# Altium PCB HornetPCB.PcbDoc (part 1 of 2)
Units mil, origin at the board's own origin, x right, y up, seen from the top; angles counter-clockwise.
Board outline 2280 x 3500 mil, 4 copper layers (Top Layer, Ground, Power, Bottom Layer), stack 23.756 mil thick; 76 components, 42 nets, 264 pads, 76 vias.
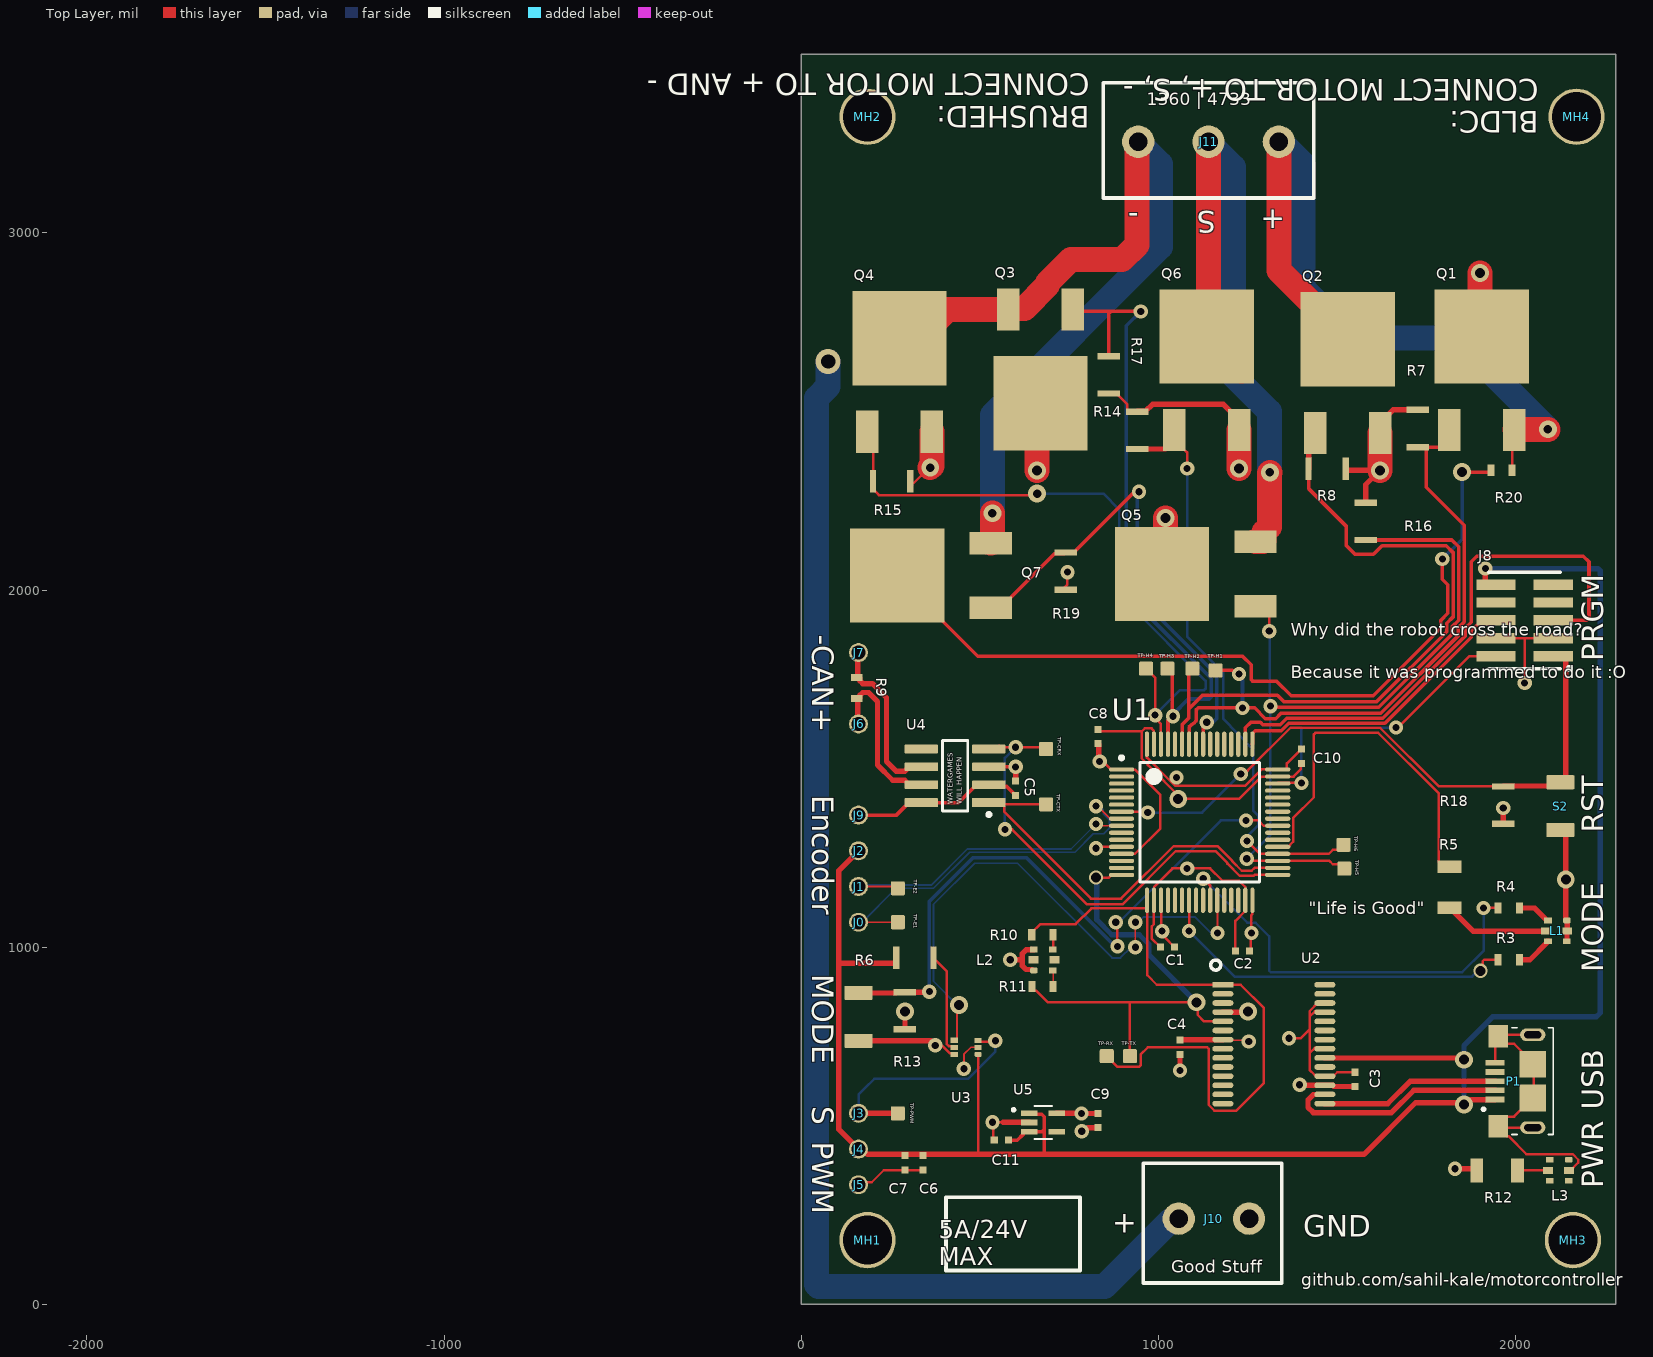
[diagram p0: Top Layer view]
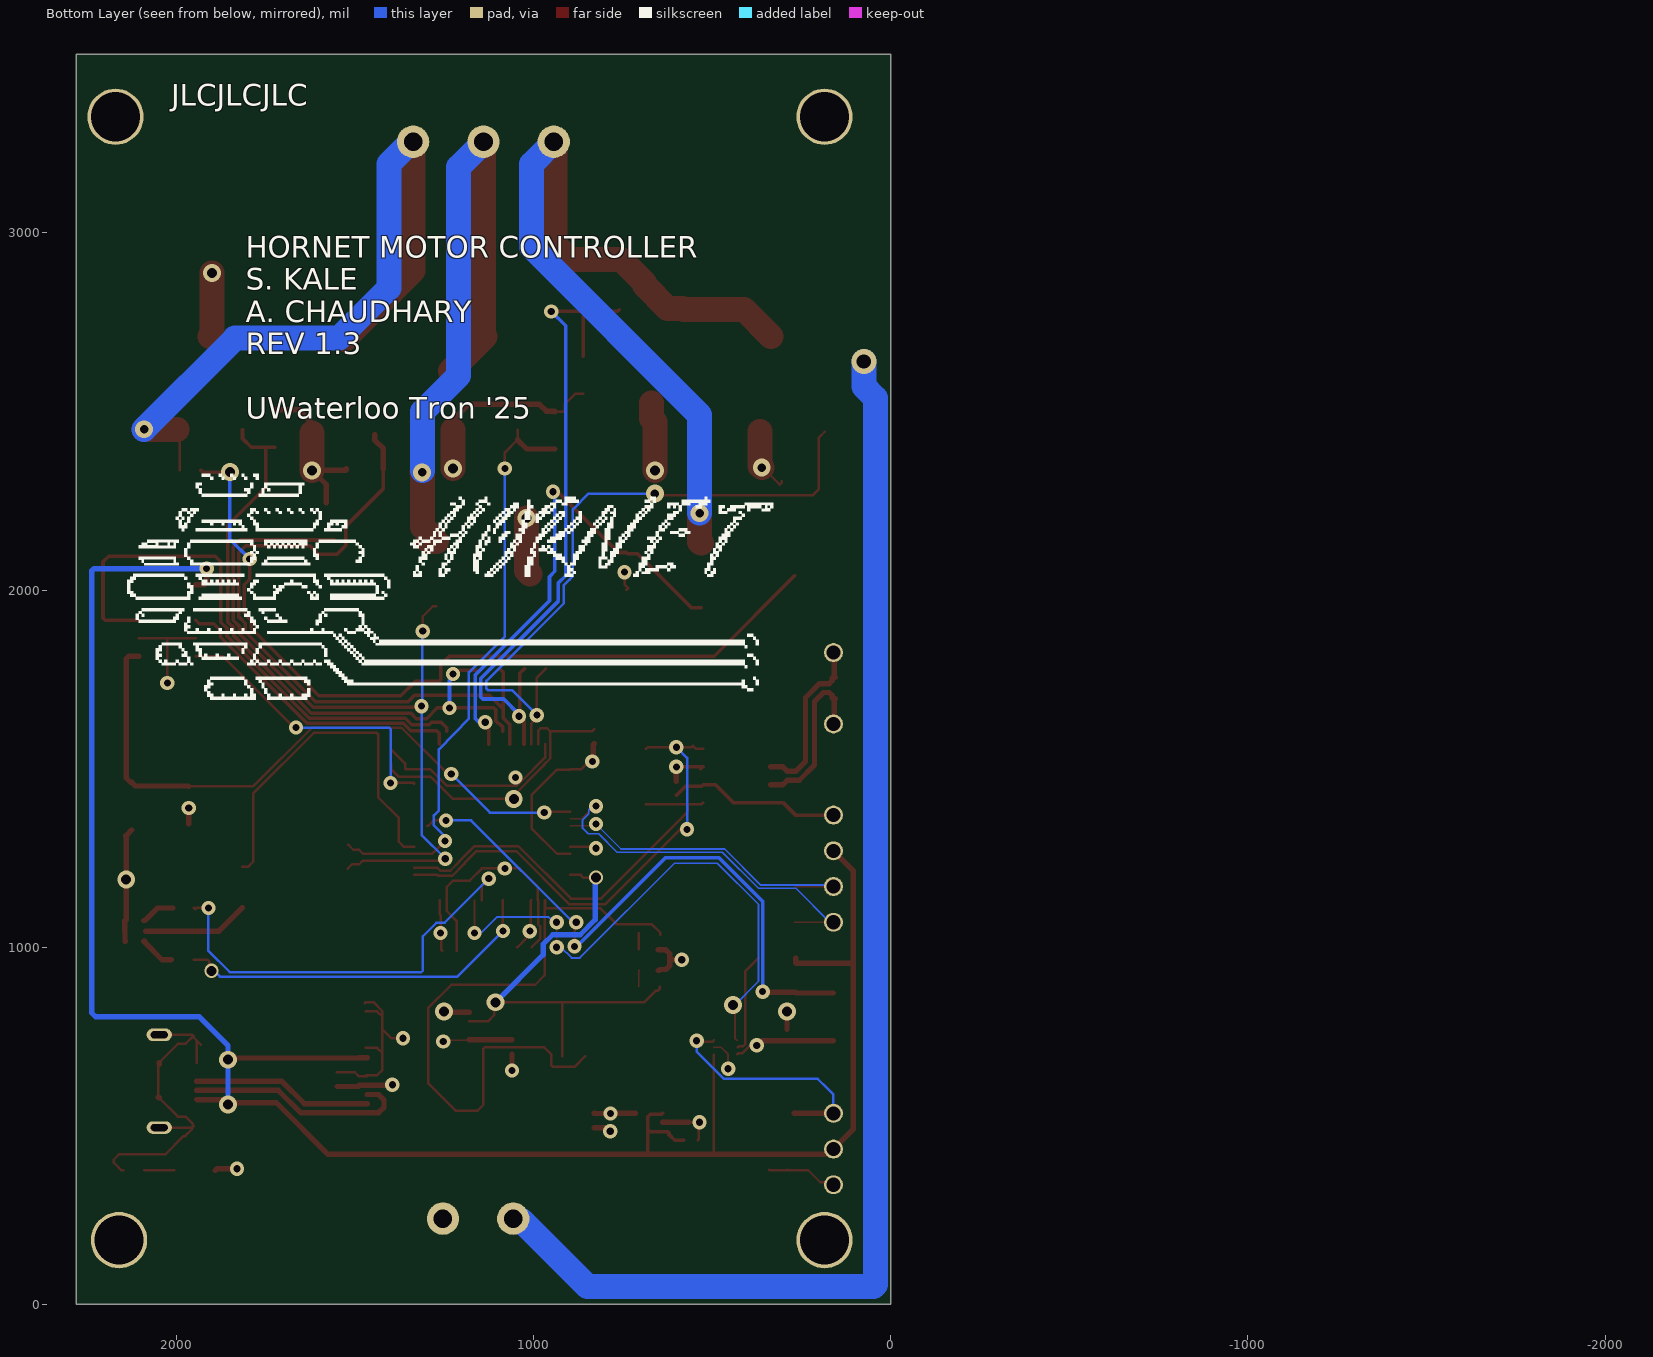
[diagram p1: Bottom Layer view, seen from below]
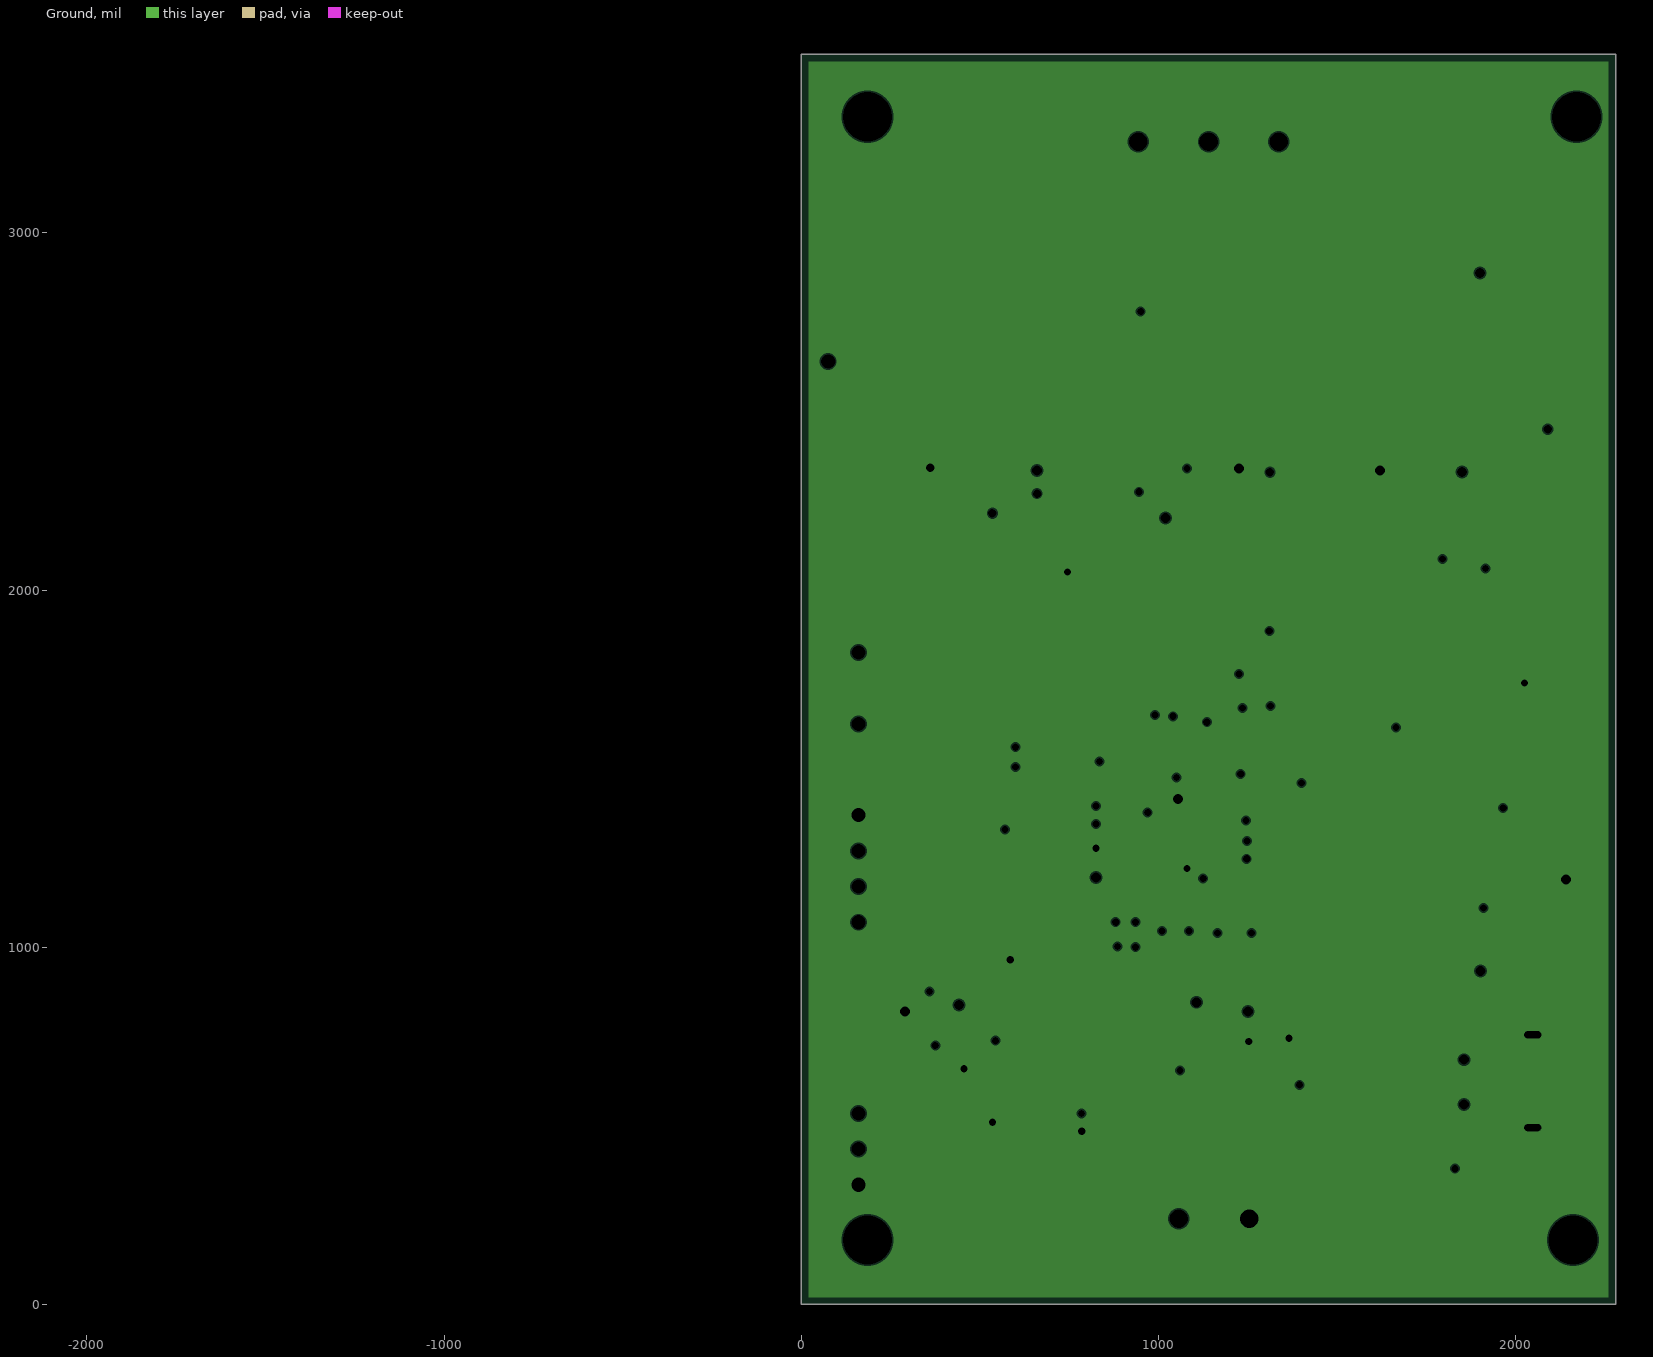
[diagram p2: Ground, clearances drawn from the general rule]
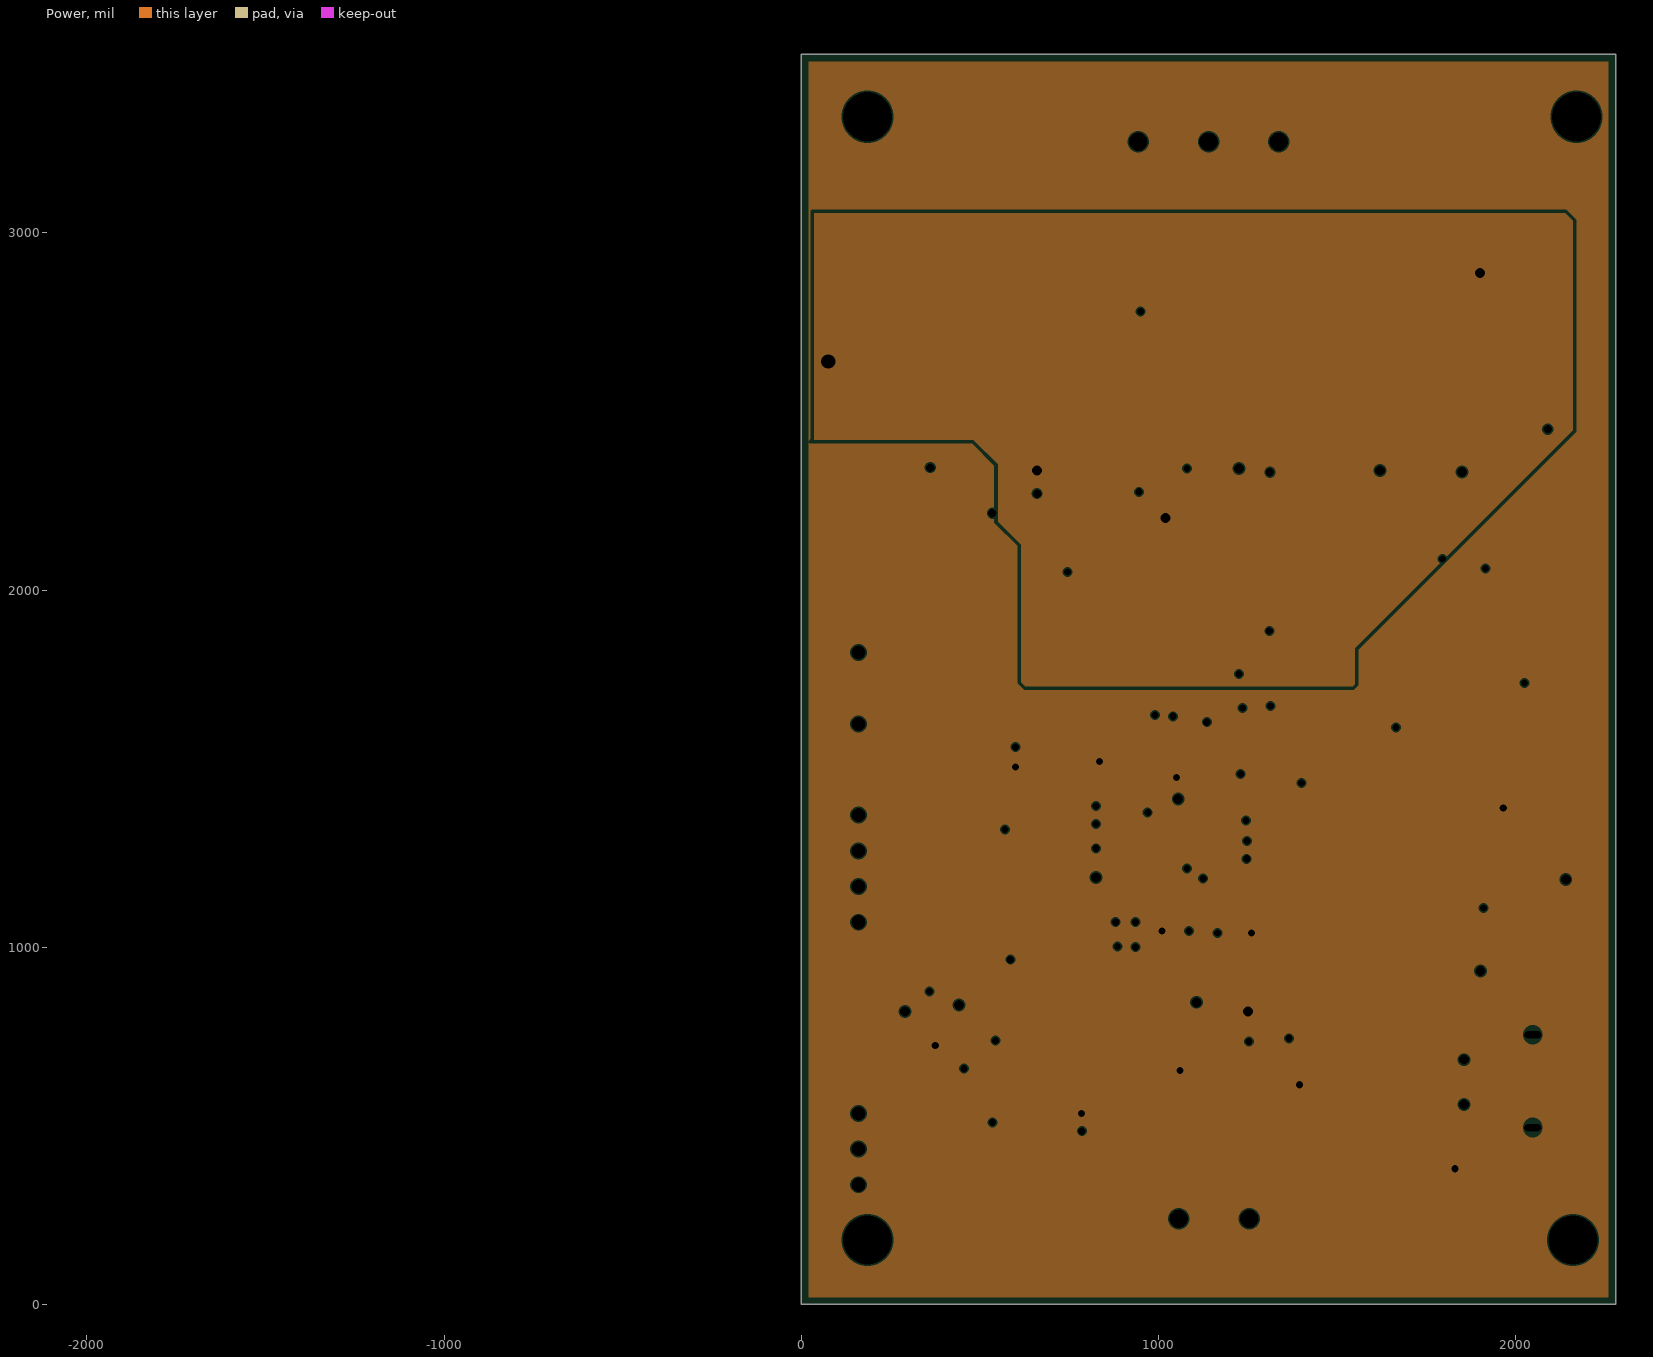
[diagram p3: Power, clearances drawn from the general rule]
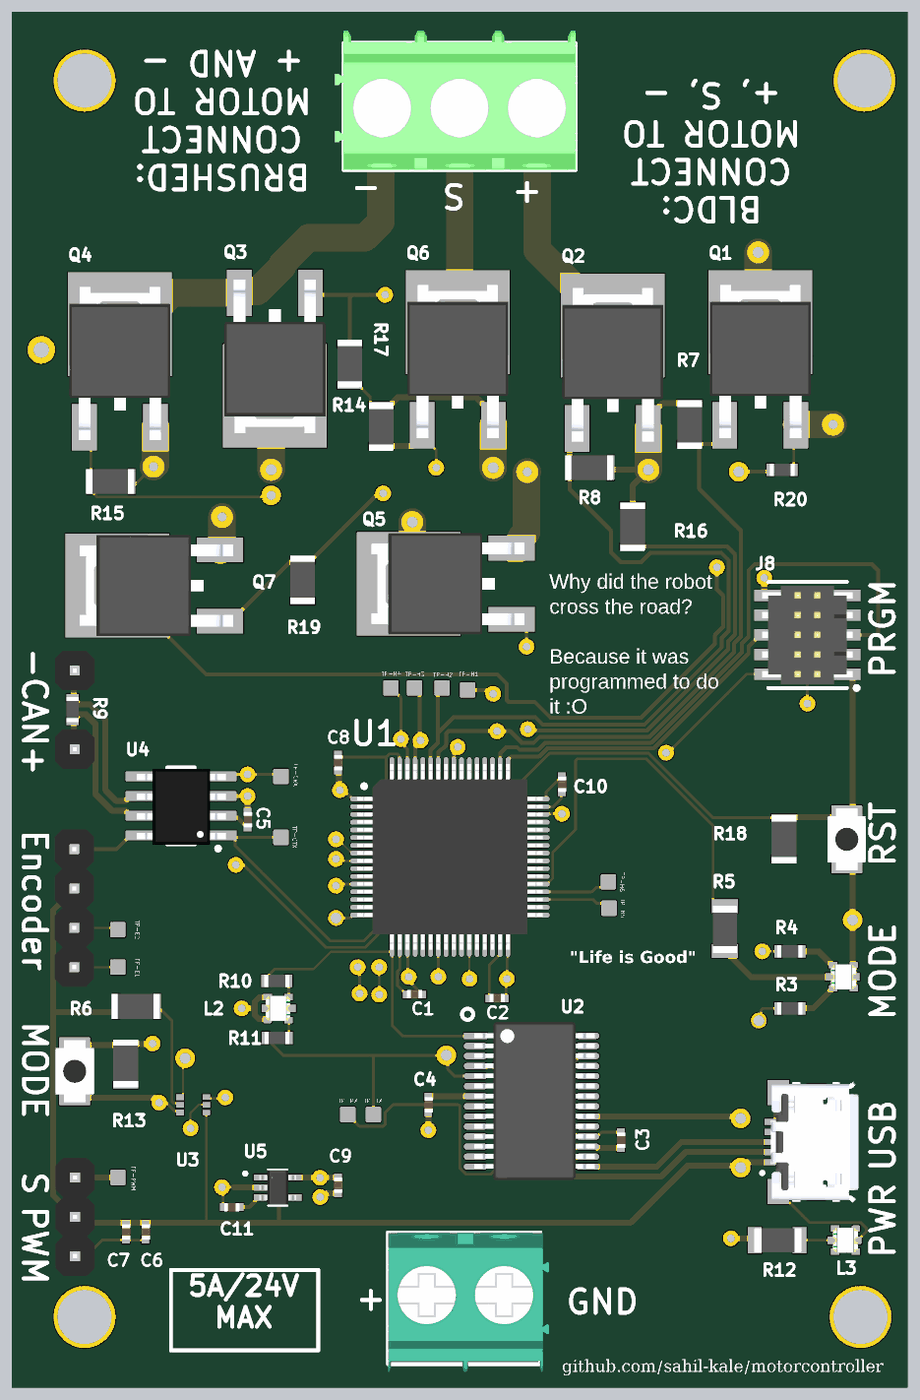
[diagram p4: 3D render of the assembled board from above, using the file's embedded part models]

## Layer stack, top to bottom
Top Solder: solder mask 0.4, Solder Resist, Dk 3.5
Top Layer: signal copper 1.4
Dielectric 2: prepreg 2.8, PP-006, Dk 4.1
Ground: plane copper 1.378, net GND
Dielectric 1: dielectric 12.6, FR-4, Dk 4.8
Power: plane copper 1.378, net (Multiple Nets)
Dielectric 3: prepreg 2.8, PP-006, Dk 4.1
Bottom Layer: signal copper 1.4
Bottom Solder: solder mask 0.4, Solder Resist, Dk 3.5

## Board outline
0,0 2280,0 2280,3500 0,3500

## Design rules (kind name [scope] priority, off if disabled: settings)
BoardOutlineClearance [All] p1: gap=7.87 ignorepadtopadclearanceinfootprint=FALSE
Clearance [All] p1: gap=4 ignorepadtopadclearanceinfootprint=FALSE except(5: Arc-Via Track-Via SMDPad-Via THPad-Via Via-Via Via-Fill Via-Poly Via-Region Via-Text; 9.84: Arc-Hole Track-Hole SMDPad-Hole THPad-Hole Via-Hole Fill-Hole Poly-Hole Region-Hole Text-Hole)
ComponentClearance [All] p1: gap=4 collisioncheckmode=3 verticalgap=4 showdistances=TRUE
DiffPairsRouting [All] p1: maxlimit=4 minlimit=4 mostfreqgap=4 toplayer_minwidth=4 toplayer_maxwidth=71497.94 toplayer_prefwidth=4 bottomlayer_minwidth=4 bottomlayer_maxwidth=71497.94 bottomlayer_prefwidth=4 maxuncoupledlength=500
Height [All] p1: minheight=0 maxheight=71497.94 prefheight=500
HoleSize [All] p1: absolutevalues=TRUE maxlimit=248.03 minlimit=7.87 maxpercent=80.000 minpercent=20.000
HoleToHoleClearance [All] p1: gap=9.84 allowstackedmicrovias=FALSE
MinimumAnnularRing [All] p1: minimumring=3
MinimumSolderMaskSliver [All] p1: minsoldermaskwidth=0
PlaneClearance [All] p1: clearance=4
PlaneConnect PlaneConnectPowerPads [InPadClass('PowerPads')] p1: planeconnectstyle=Direct reliefexpansion=20 reliefentries=4 reliefconductorwidth=10 reliefairgap=10
PlaneConnect [All] p2: pad.planeconnectstyle=Relief pad.reliefexpansion=11.81 pad.reliefentries=4 pad.reliefconductorwidth=4 pad.reliefairgap=4 via.planeconnectstyle=Direct via.reliefexpansion=11.81 via.reliefentries=4 via.reliefconductorwidth=5 via.reliefairgap=5
PolygonConnect PolygonConnectPowerPads [All vs (InPadClass('PowerPads'))] p1: connectstyle=Direct reliefconductorwidth=10 reliefentries=4 polygonreliefangle="90 Angle" airgapwidth=10
PolygonConnect [All] p2: thpad.connectstyle=Relief thpad.reliefconductorwidth=4 thpad.reliefentries=4 thpad.polygonreliefangle="90 Angle" thpad.airgapwidth=4 smdpad.connectstyle=Relief smdpad.reliefconductorwidth=4 smdpad.reliefentries=4 smdpad.polygonreliefangle="90 Angle" smdpad.airgapwidth=4 via.connectstyle=Direct via.reliefconductorwidth=5 via.reliefentries=4 via.polygonreliefangle="90 Angle" via.airgapwidth=5
RoomDefinition "SH3 - Debug Communication" [InComponentClass('SH3 - Debug Communication')] p1: confinementstyle=ConfineIn formatcopy=TRUE lockcomponents=FALSE outline -4180,-1375 -2180,-1375 -2180,-375 -4180,-375
RoomDefinition "SH2 - HBridge" [InComponentClass('SH2 - HBridge')] p2: confinementstyle=ConfineIn formatcopy=TRUE lockcomponents=FALSE outline -4180,-1375 -2180,-1375 -2180,-375 -4180,-375
RoomDefinition "SH1 - STM32" [InComponentClass('SH1 - STM32')] p3: confinementstyle=ConfineIn formatcopy=TRUE lockcomponents=FALSE outline -4180,-1375 -2180,-1375 -2180,-375 -4180,-375
RoutingVias [All] p1: holewidth=7.87 width=17.72 viastyle="Through Hole" minholewidth=7.87 minwidth=17.72 maxholewidth=248.03 maxwidth=257.87
SilkToSilkClearance [All] p1: silktosilkclearance=0
SilkToSolderMaskClearance [IsPad] p1: minsilkscreentomaskgap=4 clearancetoexposedcopper=TRUE
SolderMaskExpansion [All] p1: expansion=2.95 istentingtop=FALSE
Width [All] p1: maxlimit=71497.94 minlimit=4 preferedwidth=4
20 further rules are at their usual default settings.

## Classes and differential pairs
component class "SH4 - PWM + CAN": C5 C7 C8 C10 C11 J0 J1 J2 J3 J4 J5 J6 J7 J9 L3 R6 R9 R12 TP-PWM U3 U4 U5
component class "SH3 - Debug Communication": C6 C9 J8 L2 MODE P1 R10 R11 R13 R18 S2 TP-RX TP-TX U2
component class "SH2 - HBridge": J10 J11 Q1 Q2 Q3 Q4 Q5 Q6 Q7 R7 R8 R14 R15 R16 R17 R19 R20 TP-H1 TP-H2 TP-H3 TP-H4 TP-H5 TP-H6
component class "SH1 - STM32": C1 C2 C3 C4 L1 MH1 MH2 MH3 MH4 R3 R4 R5 TP-CRX TP-CTX TP-E1 TP-E2 U1
differential pair USB: +USB_P -USB_N
differential pair CAN: +CAN_P -CAN_N

## Components (designator, comment, footprint, x,y, rotation, side; value= is the part's Value field where it differs from the comment)
C1 "0.1uF 16V" CAP0.1uF 1015,1000 r0 top
C2 "0.1uF 16V" CAP0.1uF 1225,990 r0 top
C3 "0.1uF 16V" CAP0.1uF 1550,640 r270 top
C4 "0.1uF 16V" CAP0.1uF 1060,730 r270 top
C5 "0.1uF 16V" CAP0.1uF 600,1455 r270 top
C6 "0.1uF 16V" CAP0.1uF 340,406.5 r270 top
C7 "0.1uF 16V" CAP0.1uF 290,406.5 r270 top
C8 "0.1uF 16V" CAP0.1uF 830,1600 r270 top
C9 "0.1uF 16V" CAP0.1uF 830,525 r270 top
C10 "0.1uF 16V" CAP0.1uF 1400,1545 r270 top
C11 "0.1uF 16V" CAP0.1uF 570,460 r180 top
J0 "PIN_HEADER" PIN_HEADER 160,1070 r270 top
J1 "PIN_HEADER" PIN_HEADER 160,1170 r270 top
J2 "PIN_HEADER" PIN_HEADER 160,1270 r270 top
J3 "PIN_HEADER" PIN_HEADER 160,535 r90 top
J4 "PIN_HEADER" PIN_HEADER 160,435 r90 top
J5 "PIN_HEADER" PIN_HEADER 160,335 r90 top
J6 "CAN H" PIN_HEADER 160,1625 r0 top
J7 "CAN L" PIN_HEADER 160,1825 r0 top
J8 "CON_STM32_PROGRAMMING" FTSH-105-01-F-DV-K-P-TR 2025,1915 r90 top
J9 "PIN_HEADER" PIN_HEADER 160,1370 r270 top
J10 "CON 2-SCREW" 1935161 1155,240 r0 top
J11 "CON 3-SCREW" 1935174 1140,3255 r0 top
L1 "RGB LED" 19-337C/RSBHGHC-A88/4T 2090,1075 r0 top
L2 "RGB LED" 19-337C/RSBHGHC-A88/4T 704.06,935 r180 top
L3 "RGB LED" 19-337C/RSBHGHC-A88/4T 2095,405 r0 top
MH1 "MOUNTING HOLE" "MOUNTING HOLE"#1 185,155 r0 top
MH2 "MOUNTING HOLE" "MOUNTING HOLE"#2 125,3510 r0 top
MH3 "MOUNTING HOLE" "MOUNTING HOLE"#1 2160,155 r0 top
MH4 "MOUNTING HOLE" "MOUNTING HOLE"#3 2170,3510 r0 top
MODE "SW_SPST_NO" B3U-1000P 160,805 r90 top
P1 "Micro Type B" FCI_10118193-0001LF 1995,625 r90 top
Q1 "24A 60V" STD20NF06LT4 1905,2710 r270 top
Q2 "24A 60V" STD20NF06LT4 1529.45,2701.81 r270 top
Q3 "24A 60V" STD20NF06LT4 669.45,2523.19 r90 top
Q4 "24A 60V" STD20NF06LT4 275,2705 r270 top
Q5 "24A 60V" STD20NF06LT4 1010,2045 r0 top
Q6 "24A 60V" STD20NF06LT4 1135,2710 r270 top
Q7 "24A 60V" STD20NF06LT4 268.19,2040.55 r0 top
R3 "20Ω 0603" SDR03EZPJ200 2010,965 r180 top
R4 "20Ω 0603" SDR03EZPJ200 2010,1110 r180 top
R5 "68Ω 1206" CRCW120668R0JNEAC 1815,1110.83 r90 top
R6 "10kΩ 1206" 13-RE1206FRE0710KLCT-ND 370,970 r180 top
R7 "10kΩ 1206" 13-RE1206FRE0710KLCT-ND 1725,2504.33 r270 top
R8 "10kΩ 1206" 13-RE1206FRE0710KLCT-ND 1524.33,2340 r180 top
R9 "RES 120Ω" SDR03EZPJ200 155,1755 r270 top
R10 "20Ω 0603" SDR03EZPJ200 704.06,1035 r180 top
R11 "20Ω 0603" SDR03EZPJ200 705,890 r180 top
R12 "68Ω 1206" CRCW120668R0JNEAC 2005,375 r180 top
R13 "10kΩ 1206" 13-RE1206FRE0710KLCT-ND 290,770 r90 top
R14 "10kΩ 1206" 13-RE1206FRE0710KLCT-ND 860,2550 r90 top
R15 "10kΩ 1206" 13-RE1206FRE0710KLCT-ND 305,2305 r180 top
R16 "10kΩ 1206" 13-RE1206FRE0710KLCT-ND 1580,2244.33 r270 top
R17 "10kΩ 1206" 13-RE1206FRE0710KLCT-ND 940,2499.33 r270 top
R18 "10kΩ 1206" 13-RE1206FRE0710KLCT-ND 1965,1450 r270 top
R19 "10kΩ 1206" 13-RE1206FRE0710KLCT-ND 740,2000.67 r90 top
R20 "50V" SDR03EZPJ200 1930.94,2335 r0 top
S2 "SW_SPST_NO" B3U-1000P 2125,1395 r90 top
TP-CRX "TESTPT" "TESTPT SQUARE" 685,1555 r90 top
TP-CTX "TESTPT" "TESTPT SQUARE" 685,1400 r90 top
TP-E1 "TESTPT" "TESTPT SQUARE" 270,1070 r270 top
TP-E2 "TESTPT" "TESTPT SQUARE" 270,1165 r90 top
TP-H1 "TESTPT" "TESTPT SQUARE" 1160,1775 r90 top
TP-H2 "TESTPT" "TESTPT SQUARE" 1095,1780 r90 top
TP-H3 "TESTPT" "TESTPT SQUARE" 1025,1780 r90 top
TP-H4 "TESTPT" "TESTPT SQUARE" 965,1780 r90 top
TP-H5 "TESTPT" "TESTPT SQUARE" 1520,1220 r90 top
TP-H6 "TESTPT" "TESTPT SQUARE" 1518.21,1286.79 r90 top
TP-PWM "TESTPT" "TESTPT SQUARE" 270,535 r90 top
TP-RX "TESTPT" "TESTPT SQUARE" 855,695 r90 top
TP-TX "TESTPT" "TESTPT SQUARE" 920,695 r90 top
U1 "STM32F446RET6" STM_LQFP64_N 1115,1350 r0 top
U2 "FT232RL" FT232RL 1180,895 r0 top
U3 "5.5v MAX" 74LVC1T45Z6-7 495,700 r90 top
U4 "IC_CAN_TRANSCEIVER" LT-S8_N 525,1405 r180 top
U5 "3.3V Out 5.5V MAX" MIC5365-3.3YC5-TR 638.62,535 r0 top

## Footprints (in the part's own frame and the unit in brackets; to place one, negate y for a bottom-side part, rotate by r counter-clockwise, add the part's x,y. Pads: shape width x height; smd on the part's side, far side on the other; paste and mask are expansions set on the pad)
13-RE1206FRE0710KLCT-ND [mm]
  rect 0.45x1.6 smd: 1(0,0) 2(2.65,0)
  body extent -0.15,-0.8 2.95,0.8, height 0.65
19-337C/RSBHGHC-A88/4T [mm]
  rrect50% 0.55x0.4 smd: 1(1.35,0)
  rect 0.55x0.4 smd: 2(0,0) 5(1.35,-1.487) 6(0,-1.487)
  rect 0.7x0.5 smd: 3(1.373,-0.762) 4(-0.127,-0.762)
  body extent -0.13,-1.56 1.47,0.04, height 0.5
74LVC1T45Z6-7 [mm]
  rrect50% 0.35x0.5 smd: 1(0,0)
  rect 0.35x0.5 smd: 2(0.5,0) 3(1,0) 5(0.5,1.7)
  rect 0.375x0.5 smd: 4(1,1.7) 6(0,1.7)
1935161 [mm] "TERM BLK 2POS SIDE ENTRY 5MM PCB"
  round 2.3 hole 1.325: 1(-2.5,0) 2(2.5,0)
  silkscreen extent -5.01,-4.57 4.83,3.94, body extent -5.01,-5.06 5.39,3.94, height 11.41
1935174 [mm] "5 MM PITCH"
  round 2.3 hole 1.325: 1(-5,0) 2(0,0) 3(5,0)
  silkscreen extent -7.5,-4 7.48,4.2, body extent -8.08,-4 7.48,5, height 11.41
B3U-1000P [mm] "TACTILE SWITCH GREY"
  rrect15% 1x2 smd: 1(-1.7,0) 2(1.7,0)
  body extent -2,-1.25 2,1.25, height 1.6
CAP0.1uF [mm]
  rect 0.5x0.5 smd: 1(-0.254,0) 2(0.762,0)
  body extent -0.25,-0.25 0.75,0.3, height 0.48
CRCW120668R0JNEAC [mm]
  rect 0.9x1.7 smd: 1(0,0) 2(2.9,0)
  body extent -0.13,-0.77 2.92,0.78, height 0.65
FCI_10118193-0001LF [mm]
  rect 0.4x1.35 smd: 1(-1.3,1.338) 2(-0.65,1.338) 3(0,1.338) 4(0.65,1.338) 5(1.3,1.338)
  rect 1.6x1.4 smd: S1(-3.2,1.112) S2(3.2,1.112)
  rect 1.9x1.9 smd: S3(1.2,-1.338) S4(-1.2,-1.338)
  oval 0.9x1.8 hole 0.5 slot 1.2 at 90 deg: S5(-3.3,-1.338) S6(3.3,-1.338)
  silkscreen extent -3.8,-2.79 3.8,2.26, body extent -3.94,-4.07 3.92,1.64, height 2.8
FT232RL [mm]
  rect 1.5x0.4 smd: 1(0,0)
  oval 1.5x0.4 smd: 2(0,-0.65) 3(0,-1.3) 4(0,-1.95) 5(0,-2.6) 6(0,-3.25) 7(0,-3.9) 8(0,-4.55) 9(0,-5.2) 10(0,-5.85) 11(0,-6.5) 12(0,-7.15) 13(0,-7.8) 14(0,-8.45) 15(7.25,-8.45) 16(7.25,-7.8) 17(7.25,-7.15) 18(7.25,-6.5) 19(7.25,-5.85) 20(7.25,-5.2) 21(7.25,-4.55) 22(7.25,-3.9) 23(7.25,-3.25) 24(7.25,-2.6) 25(7.25,-1.95) 26(7.25,-1.3) 27(7.25,-0.65) 28(7.25,0)
  silkscreen extent -0.87,1.04 -0.15,1.76, body extent -0.09,-9.31 7.71,0.89, height 2
FTSH-105-01-F-DV-K-P-TR [mil] "Samtec programming header 10 positions"
  rect 29x110 smd mask+2: 1(-100,-80) 2(-100,80) 3(-50,-80) 4(-50,80) 5(0,-80) 6(0,80) 7(50,-80) 8(50,80) 9(100,-80) 10(100,80)
  silkscreen extent -140,-130 135,100, body extent -125,-115 125,115, height 241
LT-S8_N [mm] "SOP, 8-Leads, Body 4.9x3.9mm, Pitch 1.27mm, IPC Medium Density"
  rect 2.375x0.625 smd: 1(0,0)
  rrect20% 2.375x0.625 smd: 2(0,-1.27) 3(0,-2.54) 4(0,-3.81) 5(4.8,-3.81) 6(4.8,-2.54) 7(4.8,-1.27) 8(4.8,0)
  silkscreen extent -0.13,-4.41 3.3,0.97, body extent -0.51,-4.31 5.27,0.6, height 1.45
MIC5365-3.3YC5-TR [mm]
  rect 1.17x0.4 smd: 1(0,0) 2(0,-0.65) 3(0,-1.3) 4(1.94,-1.3) 5(1.94,0)
  silkscreen extent -1.23,-1.82 1.6,0.52, body extent -0.22,-1.75 2.16,0.46, height 1.09
"MOUNTING HOLE"#1 [mm]
  round 4 hole 3.5 unplated: 3(0,0.635)
"MOUNTING HOLE"#2 [mm]
  round 4 hole 3.5 unplated: 3(1.524,-4.699)
"MOUNTING HOLE"#3 [mm]
  round 4 hole 3.5 unplated: 3(0,-4.699)
PIN_HEADER [mil]
  round 53 hole 39.37: 1(0,0)
  body extent -50,-51 50,49, height 330
SDR03EZPJ200 [mm]
  rect 0.5x0.8 smd: 1(0,0) 2(1.5,0)
  body extent -0.04,-0.4 1.56,0.4, height 0.55
STD20NF06LT4 [mm]
  rect 3x1.6 smd: 1(6.65,-2.3) 3(6.65,2.3)
  rect 6.7x6.7 smd: 2(0,0)
  body extent -2.42,-3.27 7.49,3.27, height 2.55
STM_LQFP64_N [mm] "Thin QFP, 64-Leads, Body 10x10mm, Pitch 0.5mm, IPC Medium Density"
  oval 1.8x0.3 smd mask+0.05: 1(-5.55,3.75) 2(-5.55,3.25) 3(-5.55,2.75) 4(-5.55,2.25) 5(-5.55,1.75) 6(-5.55,1.25) 7(-5.55,0.75) 8(-5.55,0.25) 9(-5.55,-0.25) 10(-5.55,-0.75) 11(-5.55,-1.25) 12(-5.55,-1.75) 13(-5.55,-2.25) 14(-5.55,-2.75) 15(-5.55,-3.25) 16(-5.55,-3.75) 33(5.55,-3.75) 34(5.55,-3.25) 35(5.55,-2.75) 36(5.55,-2.25) 37(5.55,-1.75) 38(5.55,-1.25) 39(5.55,-0.75) 40(5.55,-0.25) 41(5.55,0.25) 42(5.55,0.75) 43(5.55,1.25) 44(5.55,1.75) 45(5.55,2.25) 46(5.55,2.75) 47(5.55,3.25) 48(5.55,3.75)
  oval 0.3x1.8 smd mask+0.05: 17(-3.75,-5.55) 18(-3.25,-5.55) 19(-2.75,-5.55) 20(-2.25,-5.55) 21(-1.75,-5.55) 22(-1.25,-5.55) 23(-0.75,-5.55) 24(-0.25,-5.55) 25(0.25,-5.55) 26(0.75,-5.55) 27(1.25,-5.55) 28(1.75,-5.55) 29(2.25,-5.55) 30(2.75,-5.55) 31(3.25,-5.55) 32(3.75,-5.55) 49(3.75,5.55) 50(3.25,5.55) 51(2.75,5.55) 52(2.25,5.55) 53(1.75,5.55) 54(1.25,5.55) 55(0.75,5.55) 56(0.25,5.55) 57(-0.25,5.55) 58(-0.75,5.55) 59(-1.25,5.55) 60(-1.75,5.55) 61(-2.25,5.55) 62(-2.75,5.55) 63(-3.25,5.55) 64(-3.75,5.55)
  silkscreen extent -5.67,-4.25 4.25,4.7, body extent -6,-5.99 6,6.01, height 1.56
"TESTPT SQUARE" [mm]
  rrect20% 1x1 smd: 1(0,0)

## Part data
C1 C2 C3 C4 C5 C6 C7 C8 C9 C10 C11: library part "CAP 0.1uF", "Ceramic Capacitor, Multilayer, Ceramic, 16V, 10% +Tol, 10% -Tol, X7R, 15% TC, 0.1uF, Surface Mount, 0402", Capacitance=100nF, Capacitor Type=Ceramic, Manufacturer=Murata, Manufacturer Part Number=GRM155R71C104KA88D, Max Operating Temperature=125°C, Min Operating Temperature=-55°C, Negative Tolerance=10%, Package Shape=Rectangular, Package Style=SMTMeter, Rated DC Voltage (URdc)=16V, Supplier Part Number 1=490-3261-1-ND, Temperature Characteristics Code=X7R, Category="Ceramic Capacitors", ComponentLink1Description=https://psearch.en.murata.com:443/capacitor/product/GRM155R71C104KA88%23.pdf?src-supplier=IHS+Markit, ComponentLink1URL=https://psearch.en.murata.com:443/capacitor/product/GRM155R71C104KA88%23.pdf?src-supplier=IHS+Markit, ComponentLink2Description=https://datasheet.ciiva.com/129/grm155r71c104ka88-01-129740.pdf?src-supplier=Digi-Key, ComponentLink2URL=https://datasheet.ciiva.com/129/grm155r71c104ka88-01-129740.pdf?src-supplier=Digi-Key, ComponentLink3Description=https://datasheet.ciiva.com/18102/getdatasheetpartid-85307-18102905.pdf?src-supplier=Verical, ComponentLink3URL=https://datasheet.ciiva.com/18102/getdatasheetpartid-85307-18102905.pdf?src-supplier=Verical, ComponentLink4Description=https://datasheet.ciiva.com/129/grm155r71c104ka88-01-129739.pdf?src-supplier=Digi-Key, ComponentLink4URL=https://datasheet.ciiva.com/129/grm155r71c104ka88-01-129739.pdf?src-supplier=Digi-Key, ComponentLink5Description=https://datasheet.ciiva.com/29199/454098-da-01-en-vs-kondensator-0402-29199799.pdf?src-supplier=Conrad, ComponentLink5URL=https://datasheet.ciiva.com/29199/454098-da-01-en-vs-kondensator-0402-29199799.pdf?src-supplier=Conrad, ComponentLink6Description=https://datasheet.ciiva.com/28534/4360-28534133.pdf?src-supplier=Element14, ComponentLink6URL=https://datasheet.ciiva.com/28534/4360-28534133.pdf?src-supplier=Element14, ComponentLink7Description=https://datasheet.ciiva.com/14103/grmseries-highdielectrictype-eng-14103750.pdf?src-supplier=Distrelec, ComponentLink7URL=https://datasheet.ciiva.com/14103/grmseries-highdielectrictype-eng-14103750.pdf?src-supplier=Distrelec, ComponentLink8Description=https://datasheet.ciiva.com/16199/product-16199000.pdf?src-supplier=Future+Electronics, ComponentLink8URL=https://datasheet.ciiva.com/16199/product-16199000.pdf?src-supplier=Future+Electronics, ComponentLink9Description=https://datasheet.ciiva.com/14116/grmseries-highdielectrictype-eng-14116878.pdf?src-supplier=Distrelec, ComponentLink9URL=https://datasheet.ciiva.com/14116/grmseries-highdielectrictype-eng-14116878.pdf?src-supplier=Distrelec, ComponentLink10Description=https://datasheet.ciiva.com/7937/4360-7937615.pdf?src-supplier=Element14, ComponentLink10URL=https://datasheet.ciiva.com/7937/4360-7937615.pdf?src-supplier=Element14, ComponentLink11Description=https://datasheet.ciiva.com/28534/4360-28534127.pdf?src-supplier=Element14, ComponentLink11URL=https://datasheet.ciiva.com/28534/4360-28534127.pdf?src-supplier=Element14, Dielectric Material=Ceramic, Height=0.5mm, JESD-609 Code=e3, Length=1mm, Mount="Surface Mount", Multilayer=Yes, Number of Pins=2, Packaging="Tape and Reel", Positive Tolerance=10%, Pricing 1="1=0.10000, 10=0.02100, 50=0.01140, 100=0.00930, 500=0.00666, 1000=0.00523, 2500=0.00476, 5000=0.00438 (USD)", RoHS=Yes, Size Code=0402, Stock 1=19996896, Supplier 1=Digi-Key, Terminal Finish=Nickel, Termination=Wraparound, Width=0.5mm
J0 J1 J2 J3 J4 J5 J9: "Board Connector, 1 Contact(s), 1 Row(s), Male, Straight, Solder Terminal", Flammability Rating="UL94 V-0", Manufacturer=Sullins, Manufacturer Part Number=PREC001SAAN-RC, Supplier Part Number 1=S1012EC-01-ND, Category=Connectors, ComponentLink1Description=https://datasheet.ciiva.com:443/pdfs/VipMasterIC/IC/SUCS/SUCS-S-A0005121173/SUCS-S-A0005121173-1.pdf?src-supplier=IHS+Markit, ComponentLink1URL=https://datasheet.ciiva.com:443/pdfs/VipMasterIC/IC/SUCS/SUCS-S-A0005121173/SUCS-S-A0005121173-1.pdf?src-supplier=IHS+Markit, ComponentLink2Description=https://datasheet.ciiva.com/740/zrzczzzszzn-rc-st-11635-b-740844.pdf?src-supplier=Digi-Key, ComponentLink2URL=https://datasheet.ciiva.com/740/zrzczzzszzn-rc-st-11635-b-740844.pdf?src-supplier=Digi-Key, Connector Type="BOARD CONNECTOR", Contact Gender=Male, DIN Conformance=No, Filter Feature=No, IEC Conformance=No, MIL Conformance=No, Mixed Contacts=No, Mount=Board, Mounting Style=STRAIGHT, Number of Contacts=1, Number of Rows Loaded=1, Option="General Purpose", Pricing 1="1=0.04000, 10=0.03000, 25=0.02800, 50=0.02080, 100=0.01780, 250=0.01724, 500=0.01486 (USD)", RoHS=Yes, Stock 1=16681, Supplier 1=Digi-Key, Termination=Solder
J6 J7: library part PIN_HEADER, "Board Connector, 1 Contact(s), 1 Row(s), Male, Straight, Solder Terminal", Flammability Rating="UL94 V-0", Manufacturer=Sullins, Manufacturer Part Number=PREC001SAAN-RC, Supplier Part Number 1=S1012EC-01-ND, Category=Connectors, ComponentLink1Description=https://datasheet.ciiva.com:443/pdfs/VipMasterIC/IC/SUCS/SUCS-S-A0005121173/SUCS-S-A0005121173-1.pdf?src-supplier=IHS+Markit, ComponentLink1URL=https://datasheet.ciiva.com:443/pdfs/VipMasterIC/IC/SUCS/SUCS-S-A0005121173/SUCS-S-A0005121173-1.pdf?src-supplier=IHS+Markit, ComponentLink2Description=https://datasheet.ciiva.com/740/zrzczzzszzn-rc-st-11635-b-740844.pdf?src-supplier=Digi-Key, ComponentLink2URL=https://datasheet.ciiva.com/740/zrzczzzszzn-rc-st-11635-b-740844.pdf?src-supplier=Digi-Key, Connector Type="BOARD CONNECTOR", Contact Gender=Male, DIN Conformance=No, Filter Feature=No, IEC Conformance=No, MIL Conformance=No, Mixed Contacts=No, Mount=Board, Mounting Style=STRAIGHT, Number of Contacts=1, Number of Rows Loaded=1, Option="General Purpose", Pricing 1="1=0.04000, 10=0.03000, 25=0.02800, 50=0.02080, 100=0.01780, 250=0.01724, 500=0.01486 (USD)", RoHS=Yes, Stock 1=16681, Supplier 1=Digi-Key, Termination=Solder
J8: "CONN HEADER SMD 10POS 1.27MM", Manufacturer 1=Samtec, Manufacturer Part Number 1=FTSH-105-01-F-DV-K, Package/Footprint=SMD, Supplier Part Number 1=SAM8796-ND, Mounting Type=SMD, Pitch=1.27mm, Supplier 1=Digi-Key
J10: "TERM BLK 2POS SIDE ENTRY 5MM", Manufacturer 1="Phoenix Contact", Manufacturer Part Number 1=1935161, Package/Footprint=SMD, Supplier Part Number 1=277-1667-ND, Mounting Type=TH, Supplier 1=Digi-Key
J11: "TERM BLK 3POS SIDE ENTRY 5MM", Current Rating=17.5A, Manufacturer 1="Phoenix Contact", Manufacturer Part Number 1=1935174, Package/Footprint=TH, Supplier Part Number 1=277-1578-ND, Voltage Rating=250V, Mounting Type=TH, Orientation=Straight, Pitch=5mm, Supplier 1=Digi-Key
L1 L2 L3: library part LED_RGB, "Tri Color Pcb Top View SMD Led R", Manufacturer=Everlight, Manufacturer Part Number=19-337C/RSBHGHC-A88/4T, Supplier Part Number 1=1080-1631-1-ND, Category=LEDs, Pricing 1="1=0.40000, 10=0.24400, 100=0.14030, 1000=0.10980, 2000=0.10065 (USD)", RoHS=No, Stock 1=109225, Supplier 1=Digi-Key
MODE S2: "SWITCH TACTILE SPST-NO 0.05A 12V", Manufacturer 1="Omron Electronics Inc-EMC Div", Manufacturer Part Number 1=B3U-1000P, Package/Footprint=SMD, Supplier Part Number 1=SW1020CT-ND, Mounting Type=SMD, Supplier 1=Digi-Key
P1: library part "USB Connector", "USB Connector, 5 Contact(s), Female, Right Angle, Solder Terminal, Locking, Receptacle", Contact Resistance=30mR, Flammability Rating="UL94 V-0", Insulation Resistance=1GR, Manufacturer="Amphenol FCI", Manufacturer Part Number=10118193-0001LF, Manufacturer Series=10118193, Rated Current (Signal)=1.8A, Supplier Part Number 1=609-4616-1-ND, Board Mounting Option="LOCATING POSTS", Body Breadth=0.122inch, Body Depth=0.199inch, Body Length=0.309inch, Body/Shell Style=RECEPTACLE, Category="USB Connectors", ComponentLink1Description=https://datasheet.ciiva.com:443/pdfs/VipMasterIC/IC/FRCI/FRCI-S-A0000088532/FRCI-S-A0001133856-1.pdf?src-supplier=IHS+Markit, ComponentLink1URL=https://datasheet.ciiva.com:443/pdfs/VipMasterIC/IC/FRCI/FRCI-S-A0000088532/FRCI-S-A0001133856-1.pdf?src-supplier=IHS+Markit, ComponentLink2Description=https://datasheet.ciiva.com/851/10118193-851106.pdf?src-supplier=Digi-Key, ComponentLink2URL=https://datasheet.ciiva.com/851/10118193-851106.pdf?src-supplier=Digi-Key, ComponentLink3Description=https://datasheet.ciiva.com/26853/getdatasheetpartid-418618-26853893.pdf?src-supplier=Verical, ComponentLink3URL=https://datasheet.ciiva.com/26853/getdatasheetpartid-418618-26853893.pdf?src-supplier=Verical, ComponentLink4Description=https://datasheet.ciiva.com/4598/10118193ac-197151-4598799.pdf?src-supplier=Mouser, ComponentLink4URL=https://datasheet.ciiva.com/4598/10118193ac-197151-4598799.pdf?src-supplier=Mouser, ComponentLink5Description=https://datasheet.ciiva.com/14802/10118193-0001lf-webpage-14802386.pdf?src-supplier=Arrow+Electronics, ComponentLink5URL=https://datasheet.ciiva.com/14802/10118193-0001lf-webpage-14802386.pdf?src-supplier=Arrow+Electronics, ComponentLink6Description=https://datasheet.ciiva.com/851/10118193-851107.pdf?src-supplier=Digi-Key, ComponentLink6URL=https://datasheet.ciiva.com/851/10118193-851107.pdf?src-supplier=Digi-Key, ComponentLink7Description=https://datasheet.ciiva.com/851/10118193-851108.pdf?src-supplier=Digi-Key, ComponentLink7URL=https://datasheet.ciiva.com/851/10118193-851108.pdf?src-supplier=Digi-Key, ComponentLink8Description=https://datasheet.ciiva.com/14618/70236827-14618887.pdf?src-supplier=Allied+Electronics, ComponentLink8URL=https://datasheet.ciiva.com/14618/70236827-14618887.pdf?src-supplier=Allied+Electronics, Connector Type="TELECOM AND DATACOM CONNECTOR", Contact Finish - Mating="GOLD (30) OVER NICKEL", Contact Finish - Termination="GOLD FLASH OVER NICKEL", Contact Gender=Female, Contact Material="Copper Alloy", Contact Style=USB, DIN Conformance=No, Durability=10000Cycles, Empty Shell=No, Filter Feature=No, IEC Conformance=No, Insertion Force-Max=35.1392N, Insulation Material=Polymer, JESD-609 Code=e4, Mating Information="MULTIPLE MATING PARTS AVAILABLE", MIL Conformance=No, Mixed Contacts=No, Mount=Board, Mounting Option 1=LOCKING, Mounting Style="RIGHT ANGLE", Number Of Connectors=1, Number of Contacts=5, Number Of PCB Rows=1, Option="General Purpose", PCB Contact Pattern=RECTANGULAR, Plating Thickness=30uin, Polarization Key="POLAR PIN POSITION", Pricing 1="1=0.45000, 10=0.43000, 25=0.36840, 50=0.31320, 100=0.30090, 250=0.27016, 500=0.25788 (USD)", Reference Standard=UL, Reliability=COMMERCIAL, RoHS=Yes, Shell Finish=Tin, Shell Material="Stainless Steel", Stock 1=43659, Supplier 1=Digi-Key, Terminal Pitch=0.6604mm, Termination=Solder
Q1 Q2 Q3 Q4 Q5 Q6 Q7: library part MOSFET, "Power Field-Effect Transistor, 24A I(D), 60V, 0.05ohm, 1-Element, N-Channel, Silicon, Metal-oxide Semiconductor FET, TO-252AA", Avalanche Energy Rating (Eas)=225mJ, Drain Current-Max (Abs) (ID)=24A, Drain-source On Resistance-Max=50mR, DS Breakdown Voltage-Min=60V, Manufacturer=STMicroelectronics, Manufacturer Part Number=STD20NF06LT4, Max Operating Temperature=175°C, Operating Mode="ENHANCEMENT MODE", Package Body Material=Plastic, Package Shape=Rectangular, Package Style="SMALL OUTLINEMeter", Peak Reflow Temperature (Cel)=260°C, Power Dissipation-Max (Abs)=60W, Pulsed Drain Current-Max (IDM)=96A, Supplier Part Number 1=497-5888-1-ND, Time @ Peak Reflow Temperature-Max (s)=30s, Category=MOSFETs, ComponentLink1Description=https://datasheet.ciiva.com:443/pdfs/VipMasterIC/IC/SGST/SGSTS16849/SGSTS16849-1.pdf?src-supplier=IHS+Markit, ComponentLink1URL=https://datasheet.ciiva.com:443/pdfs/VipMasterIC/IC/SGST/SGSTS16849/SGSTS16849-1.pdf?src-supplier=IHS+Markit, ComponentLink2Description=https://datasheet.ciiva.com/5774/129580-5774199.pdf?src-supplier=Farnell, ComponentLink2URL=https://datasheet.ciiva.com/5774/129580-5774199.pdf?src-supplier=Farnell, ComponentLink3Description=https://datasheet.ciiva.com/4442/cd00003407-43085-4442056.pdf?src-supplier=Mouser, ComponentLink3URL=https://datasheet.ciiva.com/4442/cd00003407-43085-4442056.pdf?src-supplier=Mouser, ComponentLink4Description=https://datasheet.ciiva.com/25625/0900766b810e88d3-25625611.pdf?src-supplier=RSComponents, ComponentLink4URL=https://datasheet.ciiva.com/25625/0900766b810e88d3-25625611.pdf?src-supplier=RSComponents, ComponentLink5Description=https://datasheet.ciiva.com/46451/1398479-46451621.pdf?src-supplier=Jameco, ComponentLink5URL=https://datasheet.ciiva.com/46451/1398479-46451621.pdf?src-supplier=Jameco, ComponentLink6Description=https://datasheet.ciiva.com/16220/cd00003407-16220218.pdf?src-supplier=Future+Electronics, ComponentLink6URL=https://datasheet.ciiva.com/16220/cd00003407-16220218.pdf?src-supplier=Future+Electronics, ComponentLink7Description=https://datasheet.ciiva.com/17320/cd00003407-17320843.pdf?src-supplier=Avnet+Europe, ComponentLink7URL=https://datasheet.ciiva.com/17320/cd00003407-17320843.pdf?src-supplier=Avnet+Europe, ComponentLink8Description=https://datasheet.ciiva.com/937/cd00003407-937437.pdf?src-supplier=Digi-Key, ComponentLink8URL=https://datasheet.ciiva.com/937/cd00003407-937437.pdf?src-supplier=Digi-Key, ComponentLink9Description=https://datasheet.ciiva.com/937/cd00003407-937438.pdf?src-supplier=Digi-Key, ComponentLink9URL=https://datasheet.ciiva.com/937/cd00003407-937438.pdf?src-supplier=Digi-Key, ComponentLink10Description=https://datasheet.ciiva.com/937/cd00003407-937439.pdf?src-supplier=Digi-Key, ComponentLink10URL=https://datasheet.ciiva.com/937/cd00003407-937439.pdf?src-supplier=Digi-Key, Drain Current-Max (ID)=24A, FET Technology="METAL-OXIDE SEMICONDUCTOR", JEDEC-95 Code=TO-252AA, JESD-30 Code=R-PSSO-G2, JESD-609 Code=e3, Moisture Sensitivity Level=1, Number of Elements=1, Number of Pins=2, Polarity/Channel Type=N-CHANNEL, Pricing 1="1=0.99000, 10=0.81000, 25=0.79520, 100=0.63000, 500=0.53400, 1000=0.43500 (USD)", Qualification Status="Not Qualified", RoHS=Yes, Stock 1=17979, Supplier 1=Digi-Key, Surface Mount=Yes, Terminal Finish=Tin, Terminal Form="Gull Wing", Terminal Position=SINGLE, Transistor Application=SWITCHING, Transistor Element Material=SILICON
R3 R4 R10 R11: library part "RES 20Ω", "Fixed Resistor, 0.1W, 20ohm, 50V, 5% +/-Tol, 200ppm/Cel, Surface Mount, 0603", Manufacturer=Rohm, Manufacturer Part Number=SDR03EZPJ200, Max Operating Temperature=155°C, Min Operating Temperature=-55°C, Package Shape=Rectangular, Rated Power Dissipation (P)=100mW, Rated Temperature=70°C, Resistance=20R, Resistor Type="FIXED RESISTOR", Supplier Part Number 1=511-1747-1-ND, Temperature Coefficient=200ppm/°C, Tolerance=5%, Working Voltage=50V, Additional Feature=ANTI-SULFUR, Category="Chip SMD Resistors", ComponentLink1Description=https://datasheet.ciiva.com:443/pdfs/VipMasterIC/IC/ROHM/ROHM-S-A0002832543/ROHM-S-A0002832543-1.pdf?src-supplier=IHS+Markit, ComponentLink1URL=https://datasheet.ciiva.com:443/pdfs/VipMasterIC/IC/ROHM/ROHM-S-A0002832543/ROHM-S-A0002832543-1.pdf?src-supplier=IHS+Markit, ComponentLink2Description=https://www.rohm.com/datasheet/SDR03EZPJ/sdr-e?src-supplier=Digi-Key, ComponentLink2URL=https://www.rohm.com/datasheet/SDR03EZPJ/sdr-e?src-supplier=Digi-Key, Mount="Surface Mount", Number of Pins=2, Packaging="Tape and Reel", Pricing 1="1=0.10000, 10=0.07300, 100=0.02800, 1000=0.01232, 2500=0.01064 (USD)", Reference Standard="TS 16949", RoHS=No, Size Code=0603, Stock 1=3900, Supplier 1=Digi-Key, Termination=Wraparound
R5 R12: library part "RES 68Ω", "VISCRCW120668R0JNEAC Res Thick Film 1206", Manufacturer=Vishay, Manufacturer Part Number=CRCW120668R0JNEAC, Max Operating Temperature=155°C, Min Operating Temperature=-55°C, Package Height=0.55mm, Package Length=3.05mm, Package Style=SMTMeter, Package Width=1.55mm, Rated Power Dissipation (P)=250mW, Resistance=68R, Resistor Type="FIXED RESISTOR", Supplier Part Number 1=541-CRCW120668R0JNEACCT-ND, Temperature Coefficient=-200200ppm/°C, Tolerance=5%, Working Voltage=200V, ComponentLink1Description=https://datasheet.ciiva.com:443/pdfs/VipMasterIC/IC/VISH/VISH-S-A0003599164/VISH-S-A0003599164-1.pdf?src-supplier=IHS+Markit, ComponentLink1URL=https://datasheet.ciiva.com:443/pdfs/VipMasterIC/IC/VISH/VISH-S-A0003599164/VISH-S-A0003599164-1.pdf?src-supplier=IHS+Markit, Construction=Chip, JESD-609 Code=e3, Number of Pins=2, Packaging="Tape and Reel", Pricing 1="1=0.10000, 10=0.06300, 100=0.02570, 1000=0.01153, 2500=0.01000 (USD)", Size Code=1206, Stock 1=24990, Supplier 1=Digi-Key, Technology="METAL GLAZE/THICK FILM", Terminal Finish=Nickel
R6 R7 R8 R13 R14 R15 R16 R17 R18 R19: library part "RES 10k Ω", "Fixed Resistor, Metal Glaze/thick Film, 0.25W, 10000ohm, 200V, 1% +/-Tol, 50ppm/Cel, Surface Mount, 1206", Manufacturer=Yageo, Manufacturer Part Number=RE1206FRE0710KL, Supplier Part Number 1=13-RE1206FRE0710KLCT-ND, Category="Chip SMD Resistors", ComponentLink1Description=https://datasheet.ciiva.com:443/pdfs/VipMasterIC/IC/YAGO/YAGO-S-A0003975721/YAGO-S-A0003975721-1.pdf?src-supplier=IHS+Markit, ComponentLink1URL=https://datasheet.ciiva.com:443/pdfs/VipMasterIC/IC/YAGO/YAGO-S-A0003975721/YAGO-S-A0003975721-1.pdf?src-supplier=IHS+Markit, ComponentLink2Description=http://www.yageo.com/NewPortal/yageodocoutput?fileName=/pdf/R-Chip/PYu-RE_105_RoHS_L_4.pdf&src-supplier=Digi-Key, ComponentLink2URL=http://www.yageo.com/NewPortal/yageodocoutput?fileName=/pdf/R-Chip/PYu-RE_105_RoHS_L_4.pdf&src-supplier=Digi-Key, Pricing 1="1=0.10000, 10=0.05900, 100=0.02390, 1000=0.01073, 2500=0.00932 (USD)", RoHS=Yes, Stock 1=6708, Supplier 1=Digi-Key
R9 R20: library part "RES 120", "Fixed Resistor, 0.1W, 120ohm, 50V, 5% +/-Tol, 200ppm/Cel, Surface Mount, 0603", Manufacturer=Rohm, Manufacturer Part Number=SDR03EZPJ121, Supplier Part Number 1=511-1735-1-ND, Category="Chip SMD Resistors", ComponentLink1Description=https://datasheet.ciiva.com:443/pdfs/VipMasterIC/IC/ROHM/ROHM-S-A0002832543/ROHM-S-A0002832543-1.pdf?src-supplier=IHS+Markit, ComponentLink1URL=https://datasheet.ciiva.com:443/pdfs/VipMasterIC/IC/ROHM/ROHM-S-A0002832543/ROHM-S-A0002832543-1.pdf?src-supplier=IHS+Markit, ComponentLink2Description=https://www.rohm.com/datasheet/SDR03EZPJ/sdr-e?src-supplier=Digi-Key, ComponentLink2URL=https://www.rohm.com/datasheet/SDR03EZPJ/sdr-e?src-supplier=Digi-Key, Pricing 1="1=0.10000, 10=0.07300, 100=0.02800, 1000=0.01232, 2500=0.01064 (USD)", RoHS=No, Stock 1=4798, Supplier 1=Digi-Key
TP-CRX TP-CTX TP-E1 TP-E2 TP-H1 TP-H2 TP-H3 TP-H4 TP-H5 TP-H6 TP-PWM TP-RX TP-TX: library part "TESTPT SQUARE"
U1: "RISC Microcontroller, 32-Bit, FLASH, CORTEX-M4F CPU, 180MHz, CMOS, PQFP64", Manufacturer=STMicroelectronics, Max Operating Temperature=85°C, Max Supply Current=115mA, Min Operating Temperature=-40°C, Package Body Material=Plastic, Package Code=QFP, Package Equivalence Code=QFP64,.47SQ,20, Package Shape=Square, Package Style=FLATPACKMeter, Power Supplies=1.8/3.3V, Supplier Part Number 1=497-15376-ND, Temperature Grade=INDUSTRIAL, Category=Microcontrollers, ComponentLink1Description=https://datasheet.ciiva.com:443/pdfs/VipMasterIC/IC/SGST/SGST-S-A0000954157/SGST-S-A0000954273-1.pdf?src-supplier=IHS+Markit, ComponentLink1URL=https://datasheet.ciiva.com:443/pdfs/VipMasterIC/IC/SGST/SGST-S-A0000954157/SGST-S-A0000954273-1.pdf?src-supplier=IHS+Markit, ComponentLink2Description=http://www.farnell.com/datasheets/2309063.pdf?src-supplier=Farnell, ComponentLink2URL=http://www.farnell.com/datasheets/2309063.pdf?src-supplier=Farnell, ComponentLink3Description=http://www.mouser.com/ds/2/389/stm32f446mc-956216.pdf?src-supplier=Mouser, ComponentLink3URL=http://www.mouser.com/ds/2/389/stm32f446mc-956216.pdf?src-supplier=Mouser, ComponentLink4Description=http://www.farnell.com/datasheets/2309063.pdf?src-supplier=Newark, ComponentLink4URL=http://www.farnell.com/datasheets/2309063.pdf?src-supplier=Newark, ComponentLink5Description=http://www.st.com/content/ccc/resource/technical/document/datasheet/65/cb/75/50/53/d6/48/24/DM00141306.pdf/files/DM00141306.pdf/jcr:content/translations/en.DM00141306.pdf?src-supplier=Digi-Key, ComponentLink5URL=http://www.st.com/content/ccc/resource/technical/document/datasheet/65/cb/75/50/53/d6/48/24/DM00141306.pdf/files/DM00141306.pdf/jcr:content/translations/en.DM00141306.pdf?src-supplier=Digi-Key, ComponentLink6Description=http://www.farnell.com/datasheets/2309063.pdf?src-supplier=Element14, ComponentLink6URL=http://www.farnell.com/datasheets/2309063.pdf?src-supplier=Element14, JESD-30 Code=S-PQFP-G64, Manufacturer Part Number=STM32F446RET6, Number of Pins=64, Pricing 1="1=9.05000, 10=8.17300, 25=7.79320, 160=6.76675, 320=6.46266, 480=5.89242, 960=5.13210, 2400=4.94202, 4960=4.75194 (USD)", Qualification Status="Not Qualified", RoHS=Yes, Speed=180RPM, Supplier 1=Digi-Key, Surface Mount=Yes, Technology=CMOS, Terminal Form="Gull Wing", Terminal Pitch=0.5mm, Terminal Position=QUAD
U2: "USB Bus Controller, CMOS, PDSO28", Manufacturer=FTDI, Manufacturer Part Number=FT232RL-REEL, Max Frequency=48MHz, Max Operating Temperature=85°C, Max Supply Current=100uA, Max Supply Voltage=5.25V, Min Operating Temperature=-40°C, Min Supply Voltage=3.3V, Package Body Material=Plastic, Package Code=SSOP, Package Shape=Rectangular, Package Style="SMALL OUTLINE, SHRINK PITCHMeter", Supplier Part Number 1=768-1007-1-ND, Temperature Grade=INDUSTRIAL, Category="Interface ICs", ComponentLink1Description=https://datasheet.ciiva.com:443/pdfs/VipMasterIC/IC/FTDI/FTDI-S-A0007980421/FTDI-S-A0007980421-1.pdf?src-supplier=IHS+Markit, ComponentLink1URL=https://datasheet.ciiva.com:443/pdfs/VipMasterIC/IC/FTDI/FTDI-S-A0007980421/FTDI-S-A0007980421-1.pdf?src-supplier=IHS+Markit, ComponentLink2Description=https://datasheet.ciiva.com/34304/2161019-34304054.pdf?src-supplier=Jameco, ComponentLink2URL=https://datasheet.ciiva.com/34304/2161019-34304054.pdf?src-supplier=Jameco, ComponentLink3Description=https://datasheet.ciiva.com/4787/ds-ft232r-11534-4787658.pdf?src-supplier=Mouser, ComponentLink3URL=https://datasheet.ciiva.com/4787/ds-ft232r-11534-4787658.pdf?src-supplier=Mouser, ComponentLink4Description=https://datasheet.ciiva.com/26841/ft232rl-reel-26841080.pdf?src-supplier=IIIC, ComponentLink4URL=https://datasheet.ciiva.com/26841/ft232rl-reel-26841080.pdf?src-supplier=IIIC, ComponentLink5Description=https://datasheet.ciiva.com/1787/ds-ft232r-1787047.pdf?src-supplier=Digi-Key, ComponentLink5URL=https://datasheet.ciiva.com/1787/ds-ft232r-1787047.pdf?src-supplier=Digi-Key, ComponentLink6Description=https://datasheet.ciiva.com/1787/ds-ft232r-1787048.pdf?src-supplier=Digi-Key, ComponentLink6URL=https://datasheet.ciiva.com/1787/ds-ft232r-1787048.pdf?src-supplier=Digi-Key, ComponentLink7Description=https://datasheet.ciiva.com/1787/ds-ft232r-1787049.pdf?src-supplier=Digi-Key, ComponentLink7URL=https://datasheet.ciiva.com/1787/ds-ft232r-1787049.pdf?src-supplier=Digi-Key, ComponentLink8Description=https://datasheet.ciiva.com/15150/getdatasheetpartid-643207-15150506.pdf?src-supplier=Verical, ComponentLink8URL=https://datasheet.ciiva.com/15150/getdatasheetpartid-643207-15150506.pdf?src-supplier=Verical, ComponentLink9Description=https://datasheet.ciiva.com/16200/ds-ft232r-16200652.pdf?src-supplier=Future+Electronics, ComponentLink9URL=https://datasheet.ciiva.com/16200/ds-ft232r-16200652.pdf?src-supplier=Future+Electronics, Height - Seated (Max)=2mm, JESD-30 Code=R-PDSO-G28, Length=10.2mm, Moisture Sensitivity Level=3, Number of Pins=28, Pricing 1="1=4.50000, 10=4.05000, 50=3.85000, 100=3.65000, 250=3.25000, 500=2.85002, 1000=2.65000 (USD)", Qualification Status="Not Qualified", RoHS=Yes, Stock 1=118964, Supplier 1=Digi-Key, Surface Mount=Yes, Technology=CMOS, Terminal Form="Gull Wing", Terminal Pitch=0.65mm, Terminal Position=DUAL, Width=5.3mm
U3: library part "Bi-Directional Logic Converter", "Bus Transceiver, LVC/LCX/Z Series, 1-Func, 1-Bit, True Output, CMOS, PDSO6", Manufacturer=Diodes, Manufacturer Part Number=74LVC1T45Z6-7, Max Operating Temperature=125°C, Min Operating Temperature=-40°C, Package Body Material=Plastic, Package Code=VSOF, Package Shape=Rectangular, Package Style="SMALL OUTLINE, VERY THIN PROFILEMeter", Power Supplies=3.3V, Supplier Part Number 1=74LVC1T45Z6-7DICT-ND, Supply Voltage-Max (Vsup)=5.5V, Supply Voltage-Min (Vsup)=1.65V, Temperature Grade=AUTOMOTIVE, Category="Logic ICs", ComponentLink1Description=https://datasheet.ciiva.com:443/pdfs/VipMasterIC/IC/DIOD/DIOD-S-A0006644025/DIOD-S-A0006644025-1.pdf?src-supplier=IHS+Markit, ComponentLink1URL=https://datasheet.ciiva.com:443/pdfs/VipMasterIC/IC/DIOD/DIOD-S-A0006644025/DIOD-S-A0006644025-1.pdf?src-supplier=IHS+Markit, ComponentLink2Description=http://www.mouser.com/ds/2/115/74LVC1T45-318124.pdf?src-supplier=Mouser, ComponentLink2URL=http://www.mouser.com/ds/2/115/74LVC1T45-318124.pdf?src-supplier=Mouser, ComponentLink3Description=http://diodes.com/datasheets/74LVC1T45.pdf?src-supplier=Avnet, ComponentLink3URL=http://diodes.com/datasheets/74LVC1T45.pdf?src-supplier=Avnet, ComponentLink4Description=https://www.diodes.com/assets/Datasheets/74LVC1T45.pdf?src-supplier=Digi-Key, ComponentLink4URL=https://www.diodes.com/assets/Datasheets/74LVC1T45.pdf?src-supplier=Digi-Key, Control Type="COMMON CONTROL", Count Direction=Bidirectional, Height - Seated (Max)=0.6mm, JESD-30 Code=R-PDSO-F6, JESD-609 Code=e3, Load/Preset Input=Yes, Logic IC Type="BUS TRANSCEIVER", Max I(ol)=24mA, Moisture Sensitivity Level=1, Number of Bits=1, Number of Functions=1, Number of Pins=6, Number of Ports=2, Output Characteristics=3-STATE, Output Polarity=True, Packaging="Tape and Reel", Pricing 1="1=0.39000, 10=0.29300, 25=0.26400, 100=0.18240, 250=0.15360, 500=0.12480, 1000=0.09600 (USD)", Qualification Status="Not Qualified", RoHS=Yes, Stock 1=88129, Supplier 1=Digi-Key, Supply Voltage-Nom (Vsup)=3.3V, Surface Mount=Yes, Technology=CMOS, Terminal Finish=Tin, Terminal Form=Flat, Terminal Pitch=0.5mm, Terminal Position=DUAL, Width=1.2mm
U4: "IC TXRX CAN 4MBPS 8SO", LCSC Part #=C117076, Manufacturer 1="Linear Technologies", Manufacturer Part Number 1=LTC2875IS8#PBF, Package/Footprint=8-SOIC, Supplier Part Number 1=LTC2875IS8#PBF-ND, Mounting Type=SMD, Supplier 1=Digi-Key
U5: library part "LDO 5.5/3.3V", "Microchip Technology MIC5365-3.3YC5-TR, LDO Voltage Regulator Controller, 150mA, 3.3 V, ±3% 5-Pin, SC-75", Manufacturer=Microchip, Manufacturer Part Number=MIC5365-3.3YC5-TR, Supplier Part Number 1=576-3193-1-ND, Category="Voltage Regulators - Linear", ComponentLink1Description=https://datasheet.ciiva.com/16466/mic5365-16466603.pdf?src-supplier=Future+Electronics, ComponentLink1URL=https://datasheet.ciiva.com/16466/mic5365-16466603.pdf?src-supplier=Future+Electronics, Pricing 1="1=0.12000, 25=0.10000, 100=0.09000 (USD)", RoHS=Yes, Stock 1=5958, Supplier 1=Digi-Key

## Via types
v1: diameter 40, hole 20, Top Layer to Bottom Layer, 54 vias
v2: diameter 50, hole 28, Top Layer to Bottom Layer, 14 vias
v3: diameter 50, hole 23.62, Top Layer to Bottom Layer, 5 vias
v4: diameter 40, hole 28, Top Layer to Bottom Layer, 2 vias
v5: diameter 70, hole 40, Top Layer to Bottom Layer, 1 vias

## Nets (pads, with @x,y where several pads share a name; then routed paths per layer and width w, separated by ;. In a path a pad name is that pad's centre, name@x,y a point inside that pad or via, vN(x,y) a via of type N, cw(c..) or ccw(c..) an arc to the next point about the centre after c; other vN are vias at no path point)
3V3: C1.2 C2.2 C3.2 C4.2 C5.1 C8.2 C9.1 C10.1 MODE.1 R12.2 R18.2 U1.1 U1.13 U1.19 U1.32 U1.48 U1.64 U2.4 U2.17 U3.6 U4.3 U5.5 | length 2260.3
  Top Layer w7: v1(375,725.24) 393.71,725.24 415.07,703.88 426.12,703.88 U3.6@430,700 ; U4.3 U4.3@532.36,1497.64 ; v1(835,1520) 844.61,1520 866.97,1497.64 U1.1 896.78,1497.36 934.06,1497.36 1005,1426.42 1005,1332.64 934.06,1261.7 896.78,1261.7 U1.13 ; U1.64 967.64,1568.22 967.64,1530.82 1036.68,1461.79 v1@1036.79,1461.79 ; U1.19 1007.65,1130.58 1007.65,1047.35 v1(1010,1045) 1016.31,1038.69 1016.31,1028.69 C1.2 ; v1(1050,1475) v1@1036.79,1461.79 ; C2.2 1257.5,992.5 1257.5,1037.5 v1(1260,1040) 1260,1090 1262.64,1092.64 U1.32 ; C10.1 1359.53,1514.53 1359.53,1499.86 1357.31,1497.64 U1.48 1288.34,1497.64 1265.72,1475.02 1265.72,1474.76 1242.46,1451.5 1047.08,1451.5 v1@1036.79,1461.79
  Top Layer w10: U4.3 v1(600,1505)
  Top Layer w15: MODE.1 362.17,738.07 v1(375,725.24) ; C5.1 v1(600,1505) ; U5.5 783.68,535 v1(784.43,534.25) 784.81,534.62 829.62,534.62 C9.1 ; C8.2 832.34,1567.66 832.34,1522.66 v1(835,1520) ; v1(1060,655) C4.2 ; U2.4 1180.14,818.37 1212.09,818.37 ; 1212.09,818.09 1248.09,818.09 v2(1250,820) ; v1(1395,615) 1396.64,613.36 1460.61,613.36 U2.17@1460.76,613.5 ; U2.17 1487.29,613.5 1490.79,610 C3.2 ; v1(1830,380) 1885.83,380 R12.2 ; R18.2 v1(1965,1390)
5V0: C6.1 C7.1 C11.1 J2.1 J4.1 J8.10 P1.1 R6.2 U2.20 U3.1 U5.1 U5.3 | length 6046.3
  Top Layer w7: 495,420 U3.1@495,699.3
  Top Layer w10: C11.1 604.84,460 620.59,475.75 620.59,480.94 623.46,483.82 U5.3 673.82,483.82 680,490 ; U5.1 641.5,532.13 672.87,532.13 680,525 680,490 ; 680,420 680,490
  Top Layer w15: J2.1 105,1215 105,955 ; R6.2 265.67,956.36 264.31,955 105,955 ; U2.20 1465.58,690.13 1487.76,690.13 1487.89,690 1850,690 v2(1854.94,685.06) ; v2(1855,560) 1850,565 1720,565 1575,420 680,420 495,420 185.28,420 170.28,435 J4.1 105,490 105,955 ; v2@1868.44,573.44 1941.97,573.44 P1.1 ; v1(1915,2060) 1915,2022 1922,2015 J8.10
  Bottom Layer w15: v2(1855,560) 1855,685 v2(1854.94,685.06) 1854.94,724.94 1935,805 2225,805 2236.48,816.48 2236.48,2053.52 2230,2060 v1(1915,2060)
CAN_N: J7.1 R9.1 U4.6 | length 474.6
  Top Layer w15: R9.1 R9.1@155.16,1755 ; J7.1 157.5,1822.5 157.5,1757.34 R9.1@155.16,1755 ; U4.6 301.57,1505 289.07,1492.5 266.16,1492.5 238.19,1520.47 238.19,1698.39 198.6,1737.97 172.03,1737.97 163.25,1746.76 163.25,1752.66 160.91,1755 R9.1@155.16,1755
CAN_P: J6.1 R9.2 U4.7 | length 488.7
  Top Layer w15: R9.2 R9.2@155.16,1695.94 ; J6.1@170.62,1622.5 160,1622.5 157.5,1625 157.5,1693.6 R9.2@155.16,1695.94 ; U4.7 301.57,1455 289.07,1467.5 255.81,1467.5 213.19,1510.12 213.19,1688.03 188.25,1712.97 172.03,1712.97 163.25,1704.19 163.25,1698.29 160.91,1695.94 R9.2@155.16,1695.94
GND: C1.1 C2.1 C3.1 C4.1 C5.2 C6.2 C7.2 C8.1 C9.2 C10.2 C11.2 J5.1 J8.3 J8.4 J9.1 J10.2 L1.1 L1.3 L1.5 L2.1 L2.5 L3.3 P1.5 P1.S1 P1.S2 P1.S3 P1.S4 P1.S5 P1.S6 Q2.3 Q4.3 Q6.3 R7.1 R8.1 R13.1 R14.1 R15.1 R16.1 R17.1 R19.1 S2.1 U1.12 U1.18 U1.31 U1.47 U1.63 U2.7 U2.18 U2.21 U2.25 U2.26 U3.2 U4.2 U4.8 U5.2 | length 6257.6
  Top Layer w5: v1(455,660) 455,699.95 475.03,719.98 494.7,719.98 U3.2 ; L2.5@645.14,998.92 L2.5@650.51,993.54 ; v1@832.08,1277.08 v1@836.1,1281.1 ; U1.18 U1.18@987.33,1131.78 ; U2.7 1182.06,739.4 1249.29,739.4 v1(1252.72,735.97)
  Top Layer w7: J5.1 167,342 197,342 230.75,375.75 C7.2@290,375.75 ; C7.2 291.5,375 338.5,375 C6.2 ; R15.1 305,2300.36 310.36,2295 358.13,2342.78 v3(360.68,2342.78) ; C11.2 537.5,462.5 537.5,507.5 v1(535,510) 565,510 ; U5.2@638.03,510 U5.2 ; R19.1 735,2005.67 745,2015.67 v1(745,2050) ; C8.1 836,1604 952.96,1604 ; v1@836.1,1281.1 U1.12 ; R14.1 882.64,2550 912,2520.63 912,2504.69 917.36,2499.33 R17.1 ; U1.18 987.05,1064.4 981.5,1058.85 981.5,1023.5 C1.1 ; U1.63 986.33,1569.23 986.33,1606.51 980.4,1612.44 961.4,1612.44 952.96,1604 ; U1.18@987.33,1131.78 987.33,1169.06 1038.69,1220.43 v1(1080,1220.43) 1091.63,1220.43 1144.57,1220.43 1178.9,1186.1 1225.64,1186.1 1242.67,1169.06 1242.67,1101.69 1215,1074.02 C2.1 ; v2(1055,1415) 1225.76,1415 1288.71,1477.95 1377.95,1477.95 1398.76,1498.76 1398.76,1513.76 C10.2 ; v2@1065,1415 970,1510 970,1511.5 952.96,1528.54 952.96,1604 ; v1(1365,745) 1397.97,745 1422.97,770 ; U2.18 1489.45,639.09 1500.36,650 C3.1 ; U2.21@1469.86,718.09 1437.91,718.09 1422.97,703.15 ; U2.25@1469.86,820.45 1437.91,820.45 1422.97,805.51 ; U2.18@1470,641.46 1469.86,641.6 1437.91,641.6 1422.97,656.54 1422.97,703.15 ; U2.26@1472.36,843.82 1470,846.18 1448.35,846.18 1422.97,820.81 1422.97,805.51 ; P1.S2@1931.14,726.99 P1.S2@1942.34,738.19 ; P1.5 P1.S2@1942.34,738.19 ; J8.4 2025,1865 ; P1.S1 P1.S1@1955.14,495.08 ; P1.S2 1955.14,754.92 2020.87,754.92 P1.S6@2024.81,750.98 ; P1.S1@1953.54,499.02 1953.54,505.71 1973.6,525.77 1995.26,525.77 P1.S4@2047.66,578.17 ; P1.S5@2024.81,499.02 2020.87,495.08 P1.S1@1955.14,495.08 ; v1(2025,1740) 2025,1865 ; P1.S3@2047.66,677.34 1995.26,729.74 1973.6,729.74 1953.54,749.8 1953.54,749.39 P1.S2@1942.34,738.19 ; P1.S4@2050,580.51 P1.S3@2050,672.24 ; J8.3 2025,1865 ; L3.3 2152.99,375 2175,397.01 2175,405.15 2159.78,420.37 2029.84,420.37 1979.2,471.02 1975.26,471.02 1955.14,491.14 P1.S1@1955.14,495.08 ; 1422.97,703.15 1422.97,770 ; 1422.97,770 1422.97,805.51
  Top Layer w10: J9.1 266.57,1370 301.57,1405 U4.8 440.55,1405 490.55,1455 U4.2 529.8,1450.2 574.8,1450.2 C5.2
  Top Layer w15: R13.1 v2(290,820) ; 565,510 U5.2@638.03,510 ; v1(585,965) 618.72,965 ; L2.1 647.95,935 645.3,937.66 628.97,937.66 618.72,947.91 618.72,965 ; L2.5 650.53,993.17 629.8,993.17 618.72,982.09 618.72,965 ; v1(785,485) 791.76,485 801.76,495 C9.2 ; R17.1 941.36,2500.69 964,2500.69 983.31,2520 1181.3,2520 1225.55,2475.75 Q6.3 ; C4.1@1060,741.46 U2.7 ; R8.1 1524.33,2336.36 1525.69,2335 v2(1620,2335) 1580,2295 R16.1 ; Q2.3 1620,2467.56 1656.77,2504.33 R7.1 ; P1.S4 2047.66,578.17 P1.S4@2050,580.51 ; P1.S3 P1.S3@2047.66,677.34 ; S2.1 2141.2,1311.87 2140,1310.67 v2(2140,1190) 2140,1076.57 2141.57,1075 L1.1 2143.68,1075 2144.06,1074.63 L1.3 2143.6,1044.55 2143.6,1016.83 2143.23,1016.46 L1.5
  Top Layer w70: v3(360.68,2342.78) 365.55,2347.64 Q4.3 ; v2(1225,2340) 1225,2447.64 Q6.3 ; v2(1620,2335) Q2.3
  other v1: 825,1277.08
NetJ0_1: J0.1 TP-E1.1 U1.8 | length 1080.5
  Top Layer w5: J0.1 TP-E1.1 ; v1(825,1395) 829.97,1395 865.13,1359.84 U1.8
  Bottom Layer w5: J0.1 170,1070 265,1165 370,1165 471,1266 766,1266 817.5,1317.5 846.39,1317.5 862.5,1333.61 862.5,1356.39 845,1373.89 845,1385 v1@835,1395
NetJ1_1: J1.1 TP-E2.1 U1.9 | length 913.1
  Top Layer w5: J1.1 265,1170 TP-E2.1 ; v1@835,1345 839.92,1340.08 896.42,1340.08 U1.9
  Bottom Layer w5: J1.1 164,1174 364,1174 465,1275 755,1275 v1(825,1345)
NetJ3_1: J3.1 TP-PWM.1 U3.3 | length 683.6
  Top Layer w7: U3.3 498.39,735.98 540.98,735.98 v1(543.24,738.24)
  Top Layer w15: J3.1@165,540 J3.1 TP-PWM.1
  Bottom Layer w7: J3.1 160,587.5 177.88,605.38 204,631.5 466.81,631.5 543.24,707.93 v1(543.24,738.24)
NetJ8_1: J8.1 R18.1 S2.2 U1.7 | length 1792.8
  Top Layer w7: U1.7 896.78,1379.25 967.51,1379.25 v1(969.69,1377.07) ; v1(1230,1485) 1238.93,1485 1248.5,1494.57 1249.57,1494.57 1369.5,1614.5 1620.19,1614.5 1784.69,1450 R18.1
  Top Layer w15: R18.1 1966.36,1451.36 2114.43,1451.36 S2.2 2127.81,1461.93 2140,1474.11 2140,1808 2133,1815 J8.1
  Bottom Layer w7: v1(969.69,1377.07) 1122.07,1377.07 v1(1230,1485)
NetJ8_2: J8.2 U1.46 | length 848.1
  Top Layer w7: U1.46 1335.24,1460 1400,1460 v1(1400.15,1459.85) ; v1(1665,1615) 1670,1615 1870,1815 J8.2
  Bottom Layer w7: v1(1400.15,1459.85) 1400,1460 1400,1610.9 1404.1,1615 v1(1665,1615)
NetJ8_5: J8.5 U1.50 | length 1554.8
  Top Layer w10: 1242.95,1605.07 1242.95,1614.14 1257.88,1629.07 1280.97,1629.55 1285.32,1629.55 1291.86,1623 1340.52,1623 1358.52,1641 1627.96,1641 1858,1871.04 1858,1892.75 1875,1909.75 1875,2079.14 1890.86,2095 2189.14,2095 2205,2079.14 2205,1920.86 2199.14,1915 J8.5
NetJ8_6: J8.6 U1.49 | length 853.1
  Top Layer w10: U1.49 1263.47,1569.34 1263.47,1598.38 1271.1,1606 1343.32,1606 1364.32,1627 1633.76,1627 1875,1868.24 1875,1885.71 1894.79,1905.5 1935.5,1905.5 J8.6
NetJ11_1: J11.1 Q3.3 Q4.2 Q7.3 | length 2347
  Top Layer w70: Q4.2@335,2710 410,2785 Q3.3 ; Q7.3 531.5,2131.1 535,2134.61 v3(535,2215) ; Q3.3@582.4,2788.5 624.44,2788.5 689.5,2853.56 689.5,2860.21 754.29,2925 898.21,2925 939.22,2966.01 939.22,3251.07 J11.1
  Bottom Layer w70: v3(535,2215) 535,2490 1005,2960 1005,3193.15 J11.1
NetJ11_2: J11.2 Q5.3 Q6.2 | length 1897
  Top Layer w70: J11.2 1140,2715 Q6.2 Q6.2@1231.89,2613.11 ; Q5.3 1292.36,2135.55 1295.87,2139.06 1295.87,2162.42 1310,2176.56 1310,2327.64 v3(1311.81,2329.45)
  Bottom Layer w70: J11.2 1140,3253.72 1210,3183.72 1210,2600 1310,2500 1310,2370 v3@1310,2335
NetJ11_3: J11.3 Q1.3 Q2.2 R20.2 | length 2133.8
  Top Layer w7: R20.2 1990,2442.64 Q1.3 Q1.3@1997.36,2450
  Top Layer w70: J11.3 1336.85,2894.41 Q2.2 ; Q1.3@1997.36,2450 v3(2090,2450)
  Bottom Layer w70: J11.3 1342.41,3255 1405,3192.41 1405,2845 1545,2705 1835,2705 v3(2090,2450)
NetL1_2: L1.2 R4.1 | length 95.4
  Top Layer w15: R4.1 2052.99,1110 2087.99,1075 L1.2@2090.94,1075
NetL1_4: L1.4 R5.1 | length 298.2
  Top Layer w15: R5.1 1880.83,1045 L1.4 L1.4@2085.94,1045
NetL1_6: L1.6 R3.1 | length 99.9